# Altium PCB WPT Round 2 TX Layout.PcbDoc (part 1 of 2)
Units mm, origin at the board's own origin, x right, y up, seen from the top; angles counter-clockwise.
Board outline 82 x 80 mm, 4 copper layers (Top Layer, Ground 1, Ground 2, Bottom Layer), stack 0.603 mm thick; 124 components, 48 nets, 304 pads, 238 vias.
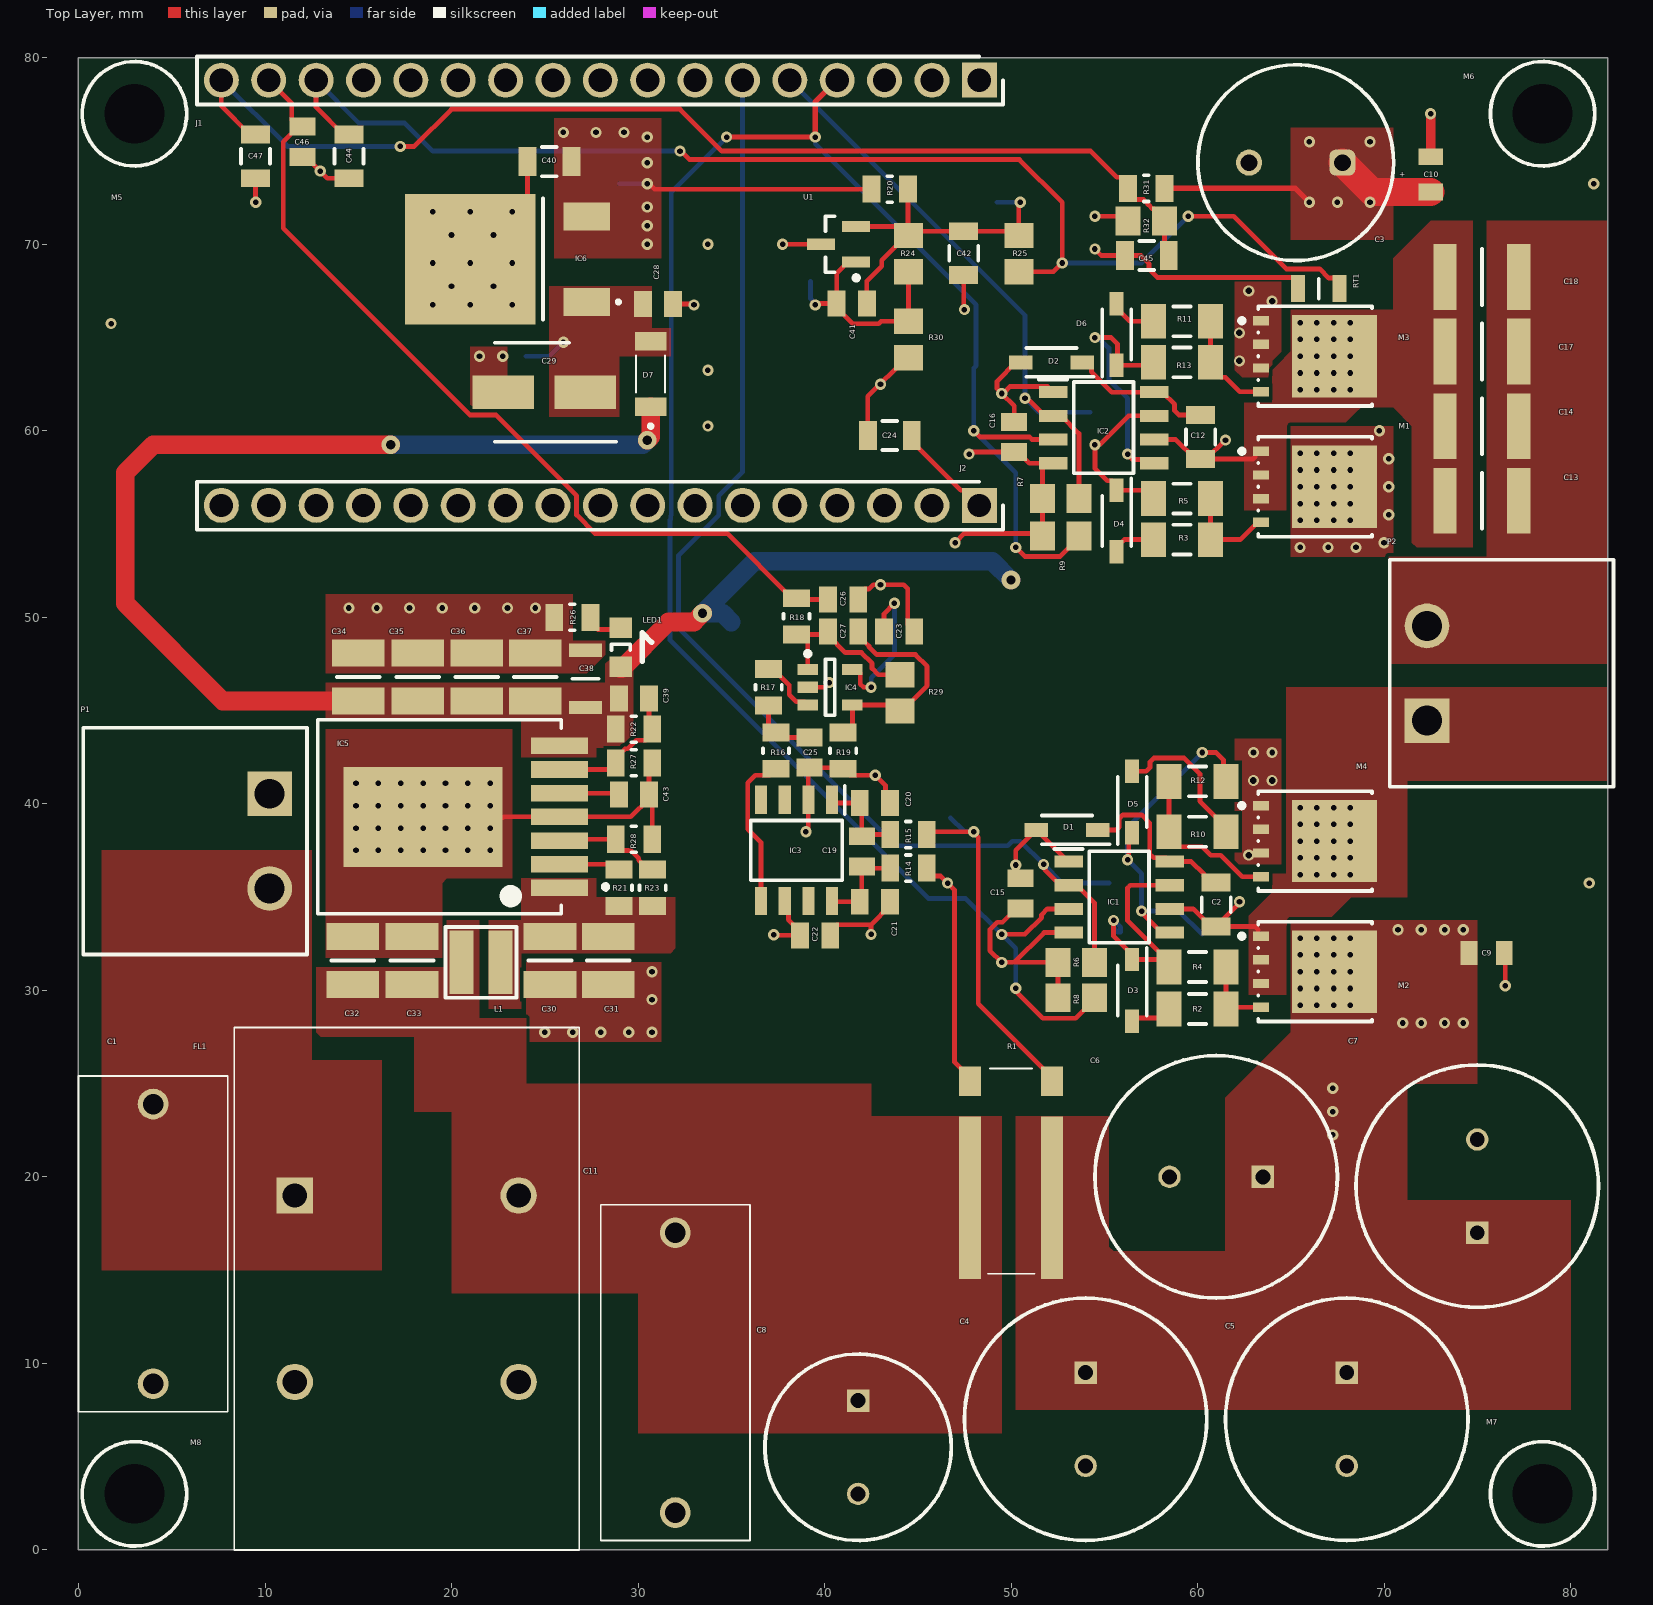
[diagram p0: Top Layer view]
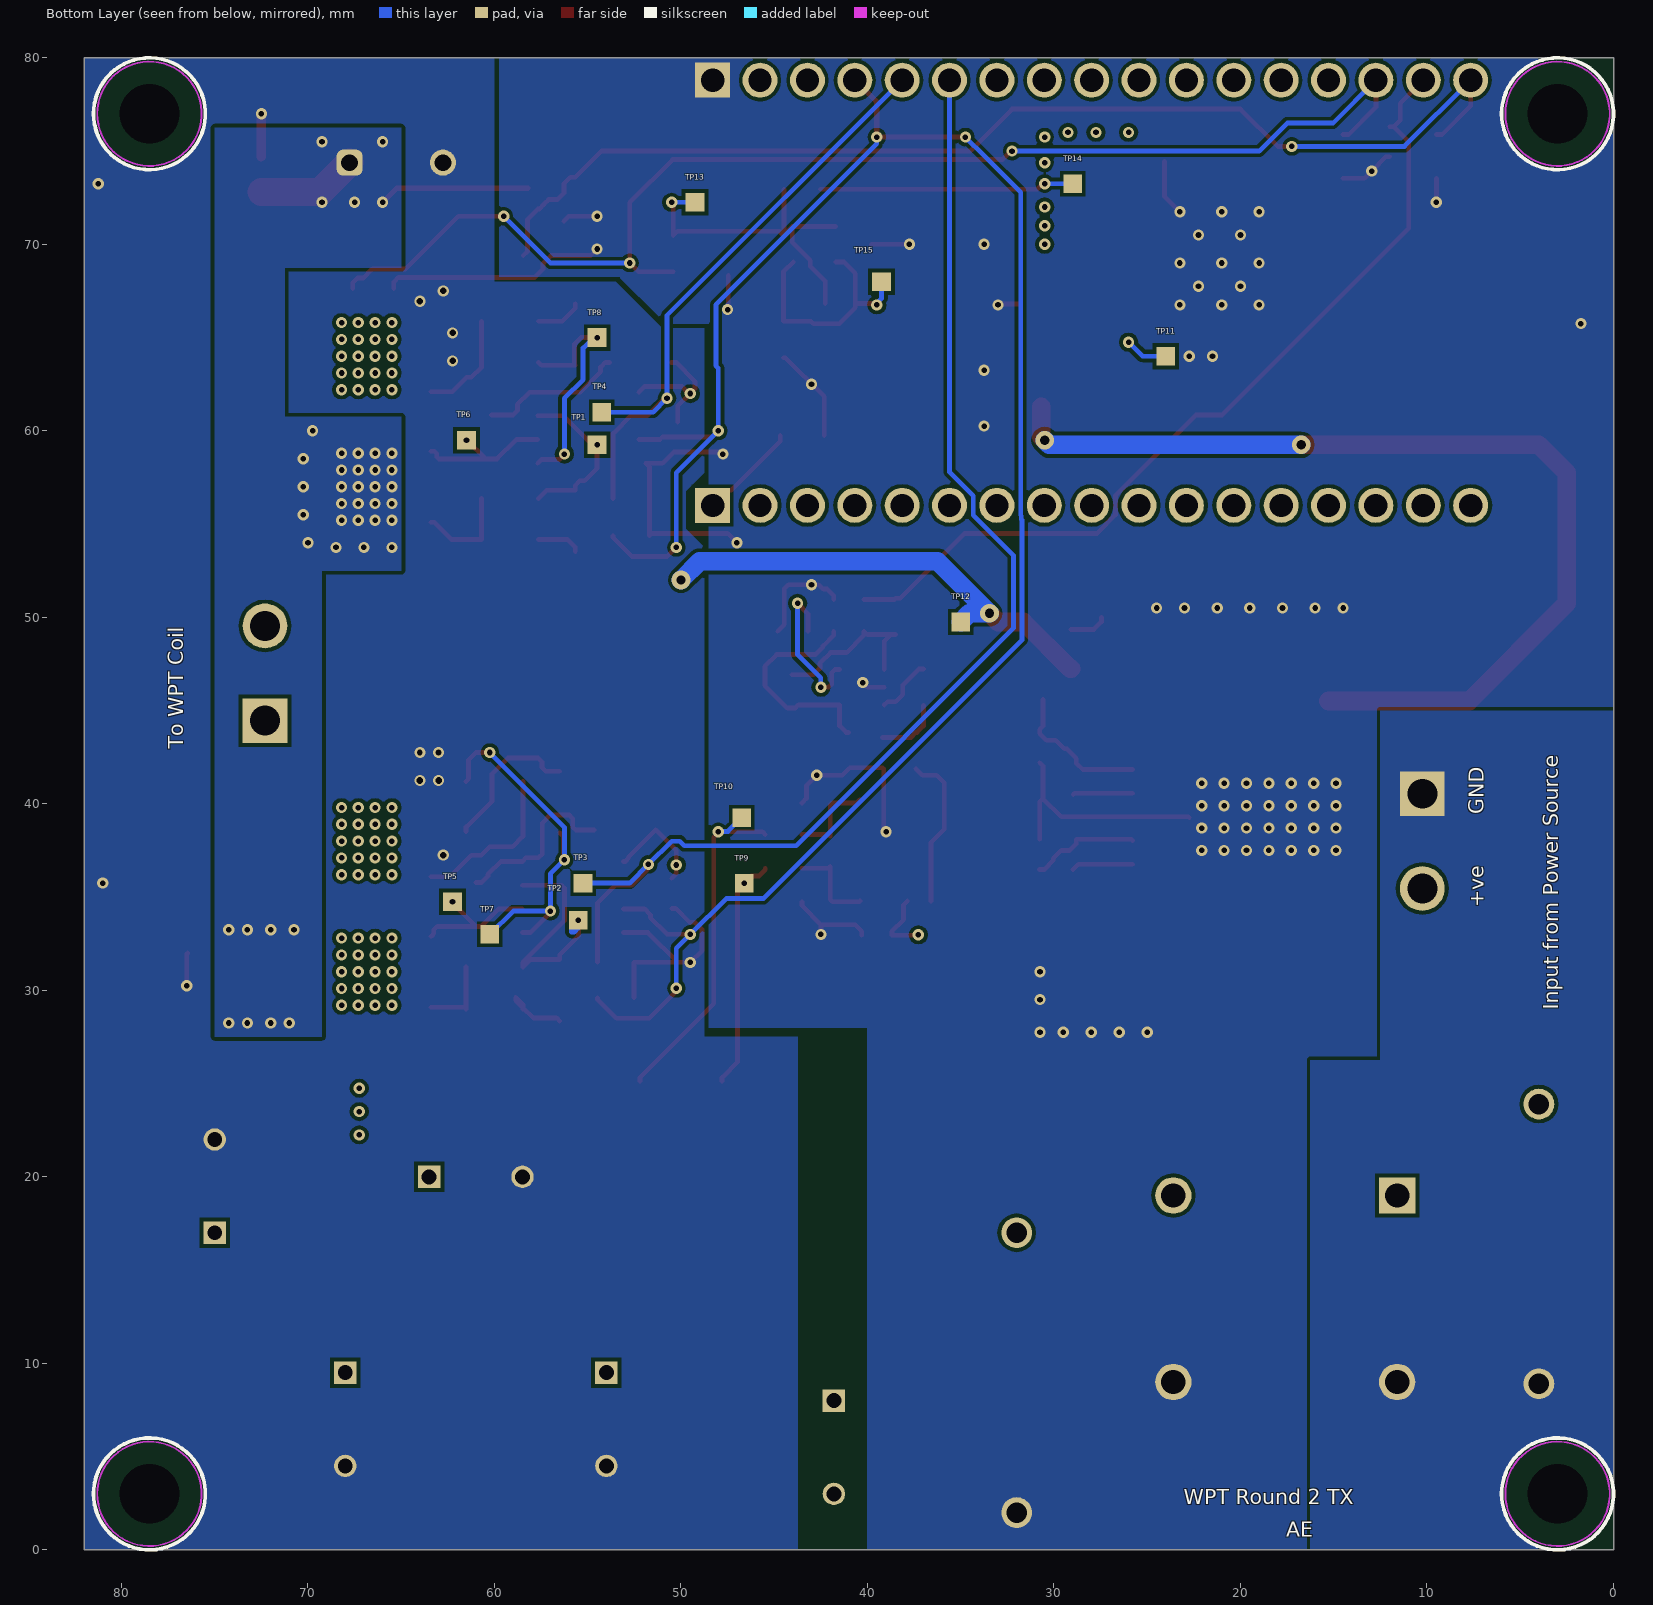
[diagram p1: Bottom Layer view, seen from below]
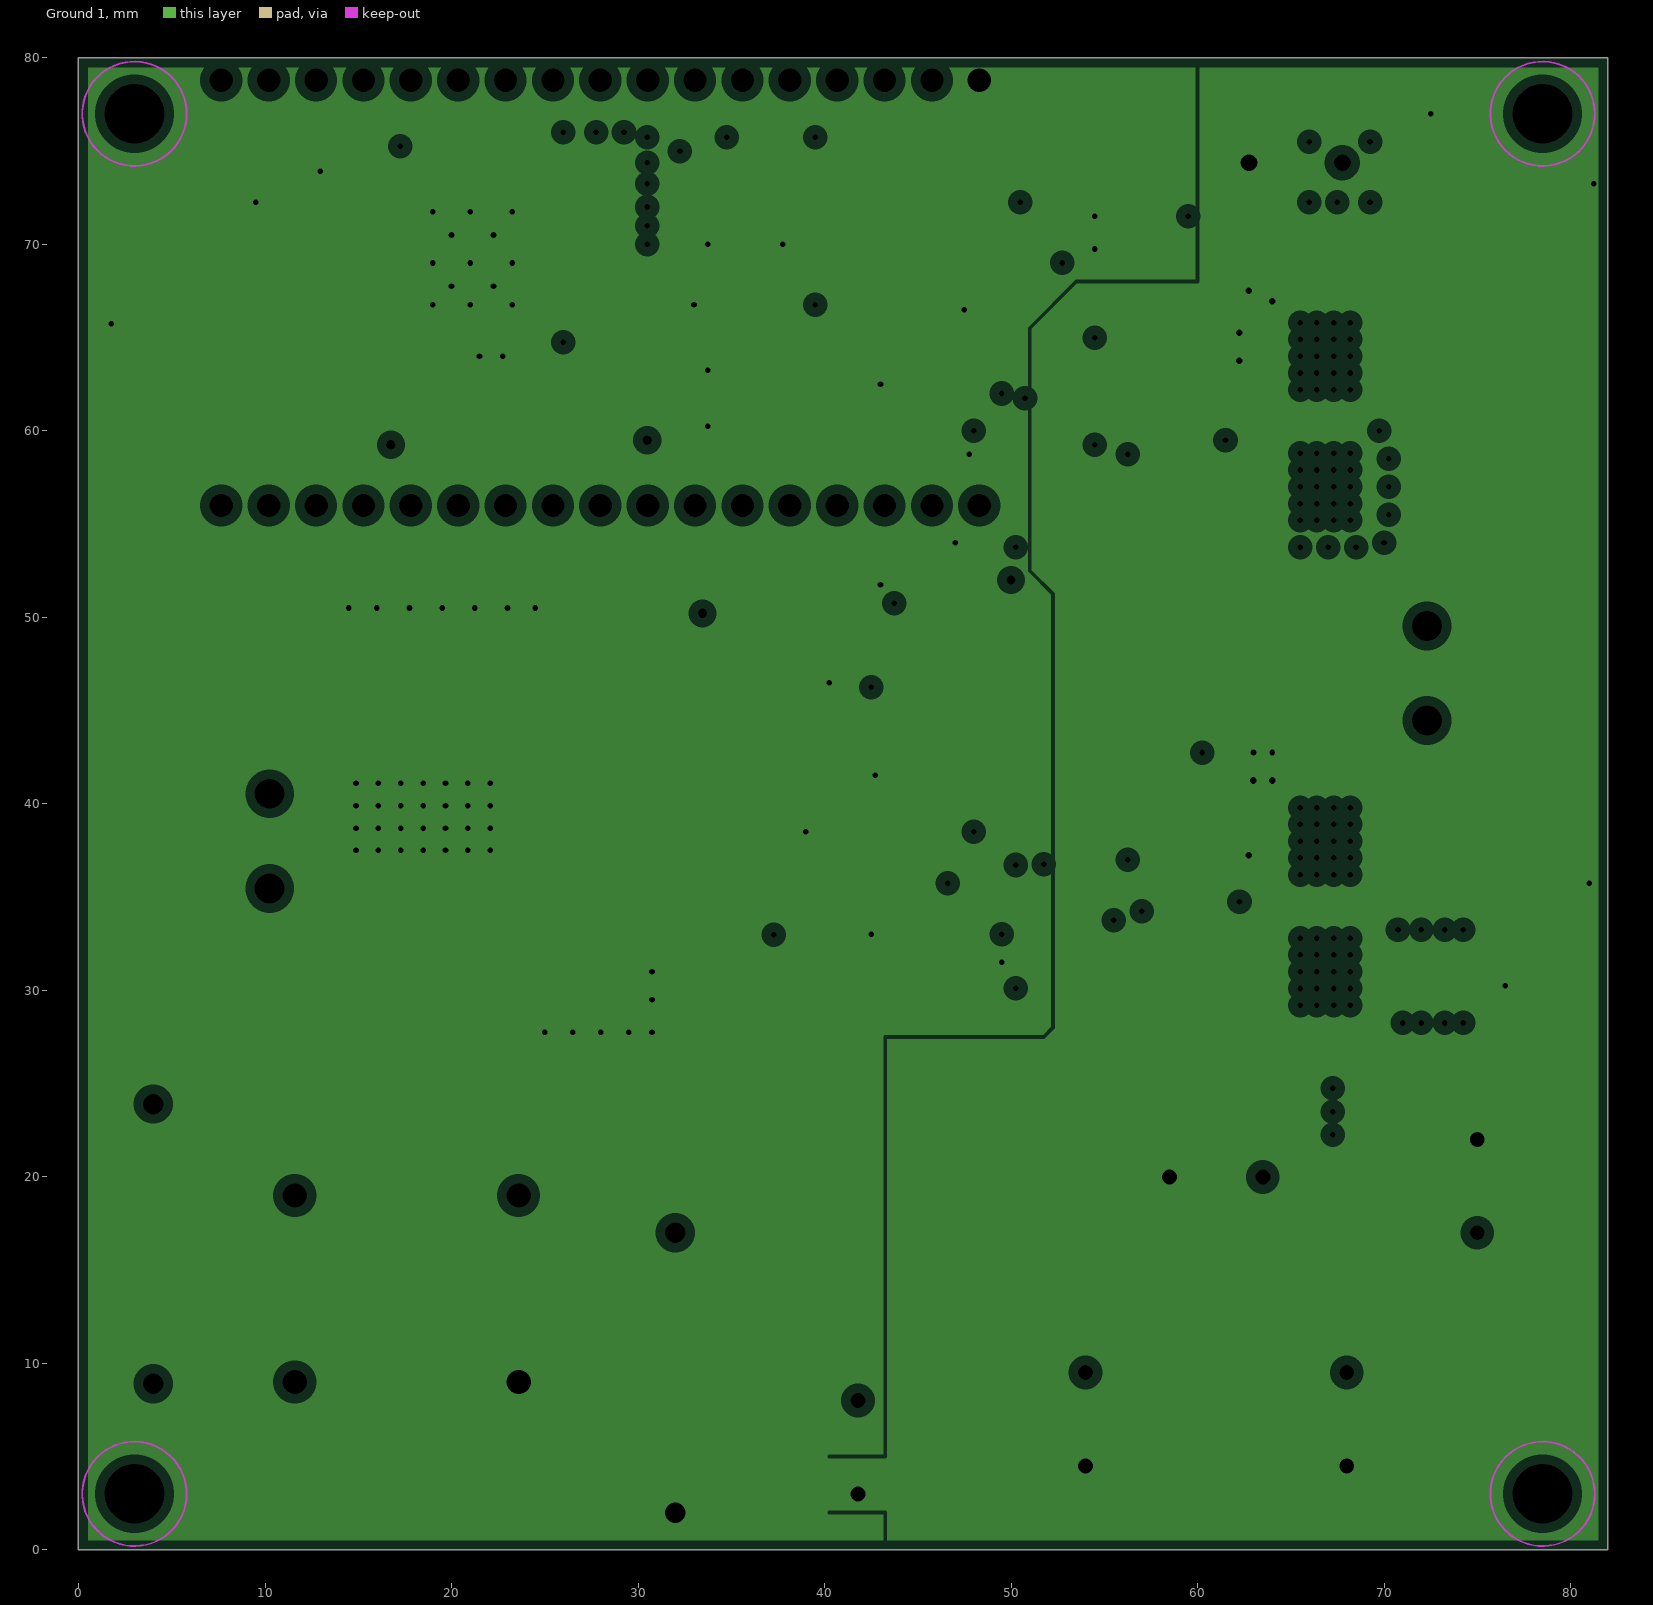
[diagram p2: Ground 1, clearances drawn from the general rule]
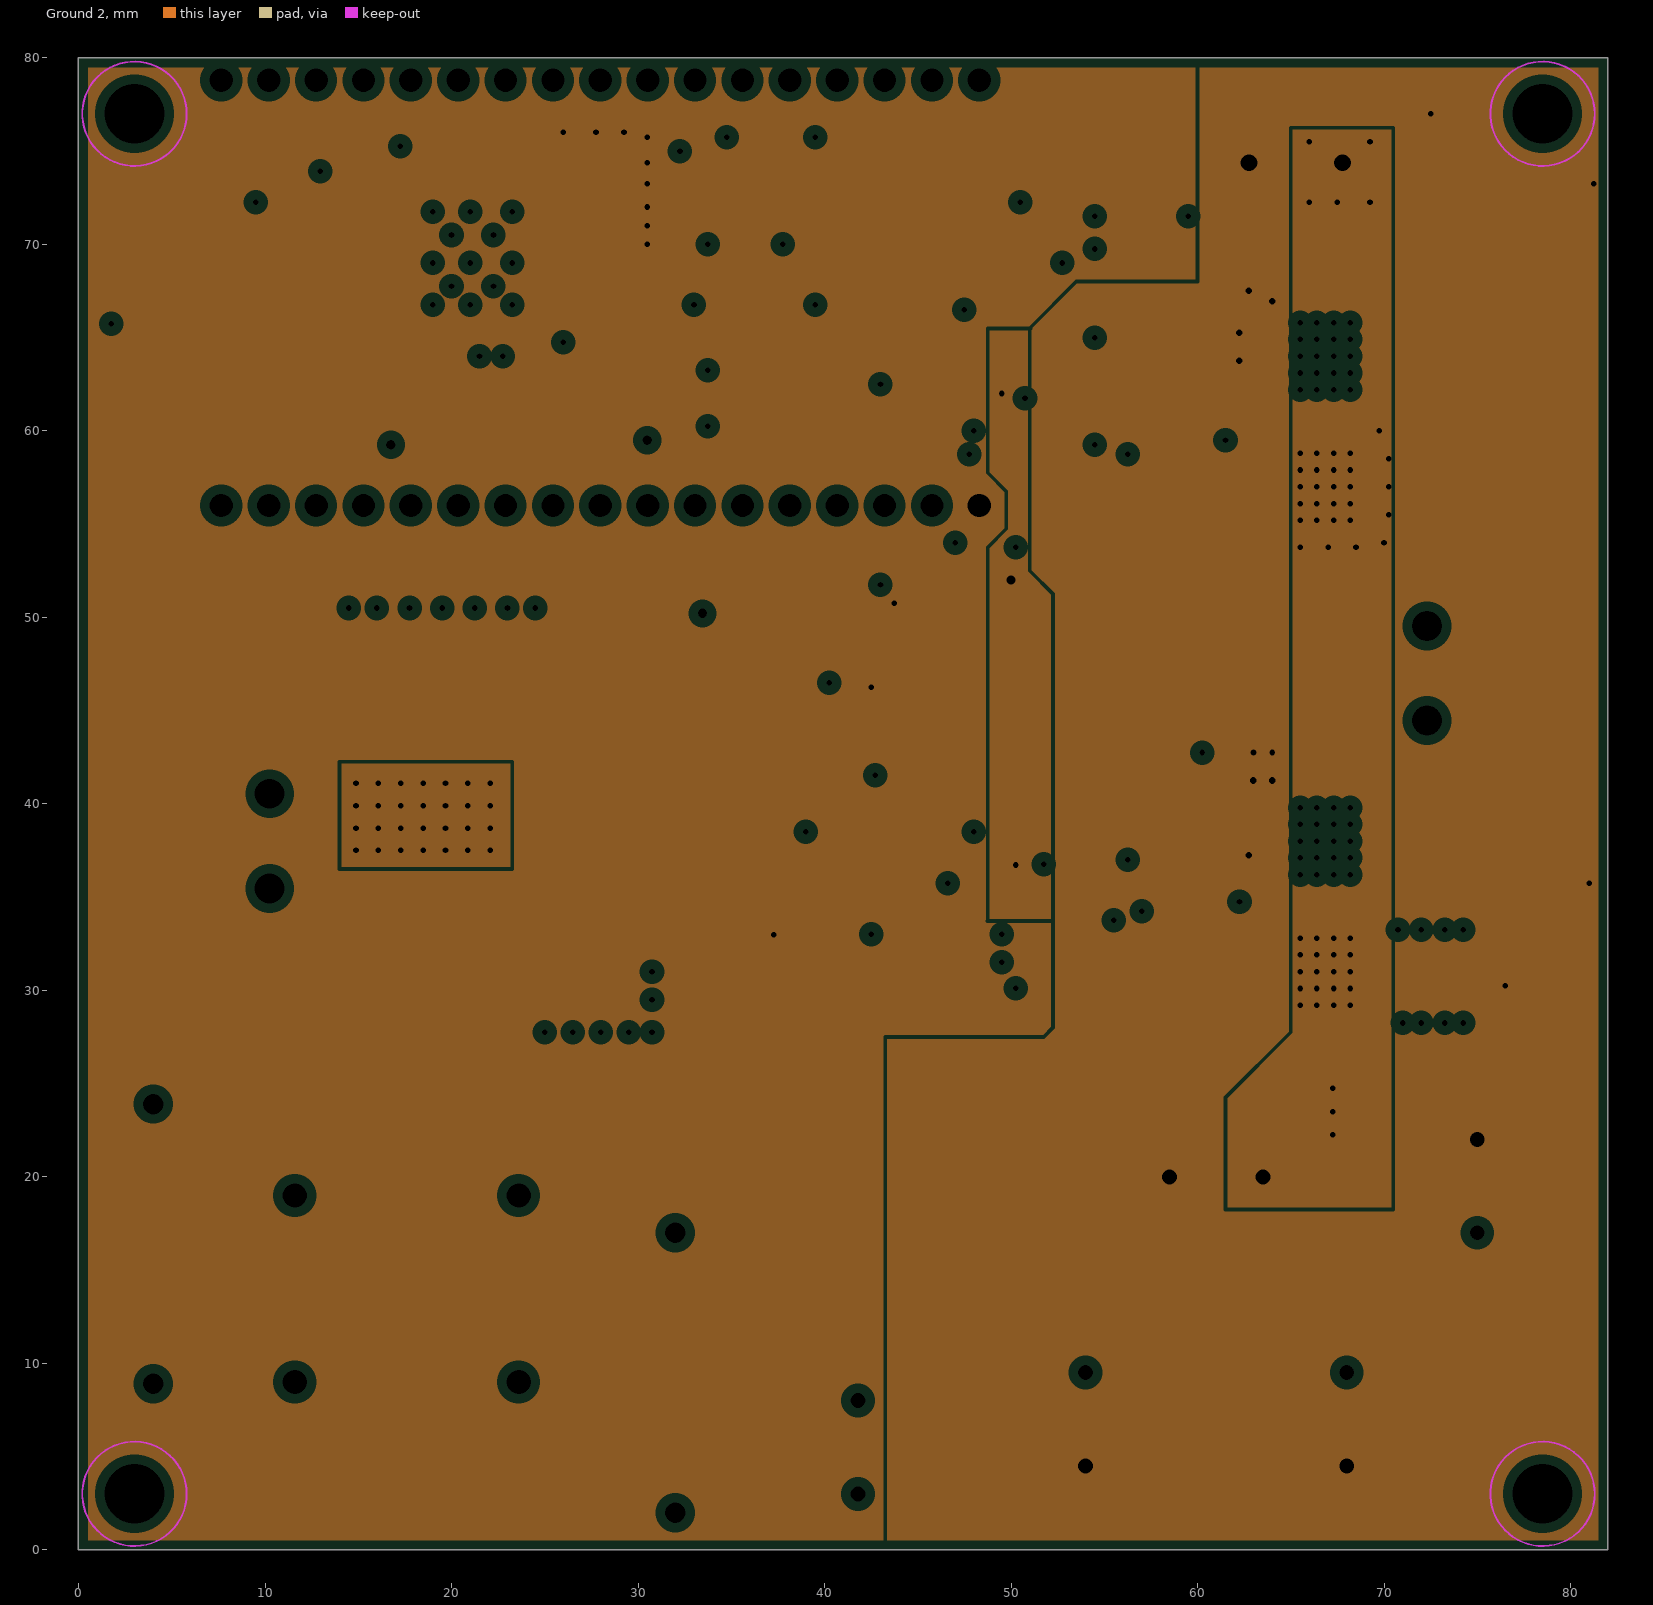
[diagram p3: Ground 2, clearances drawn from the general rule]
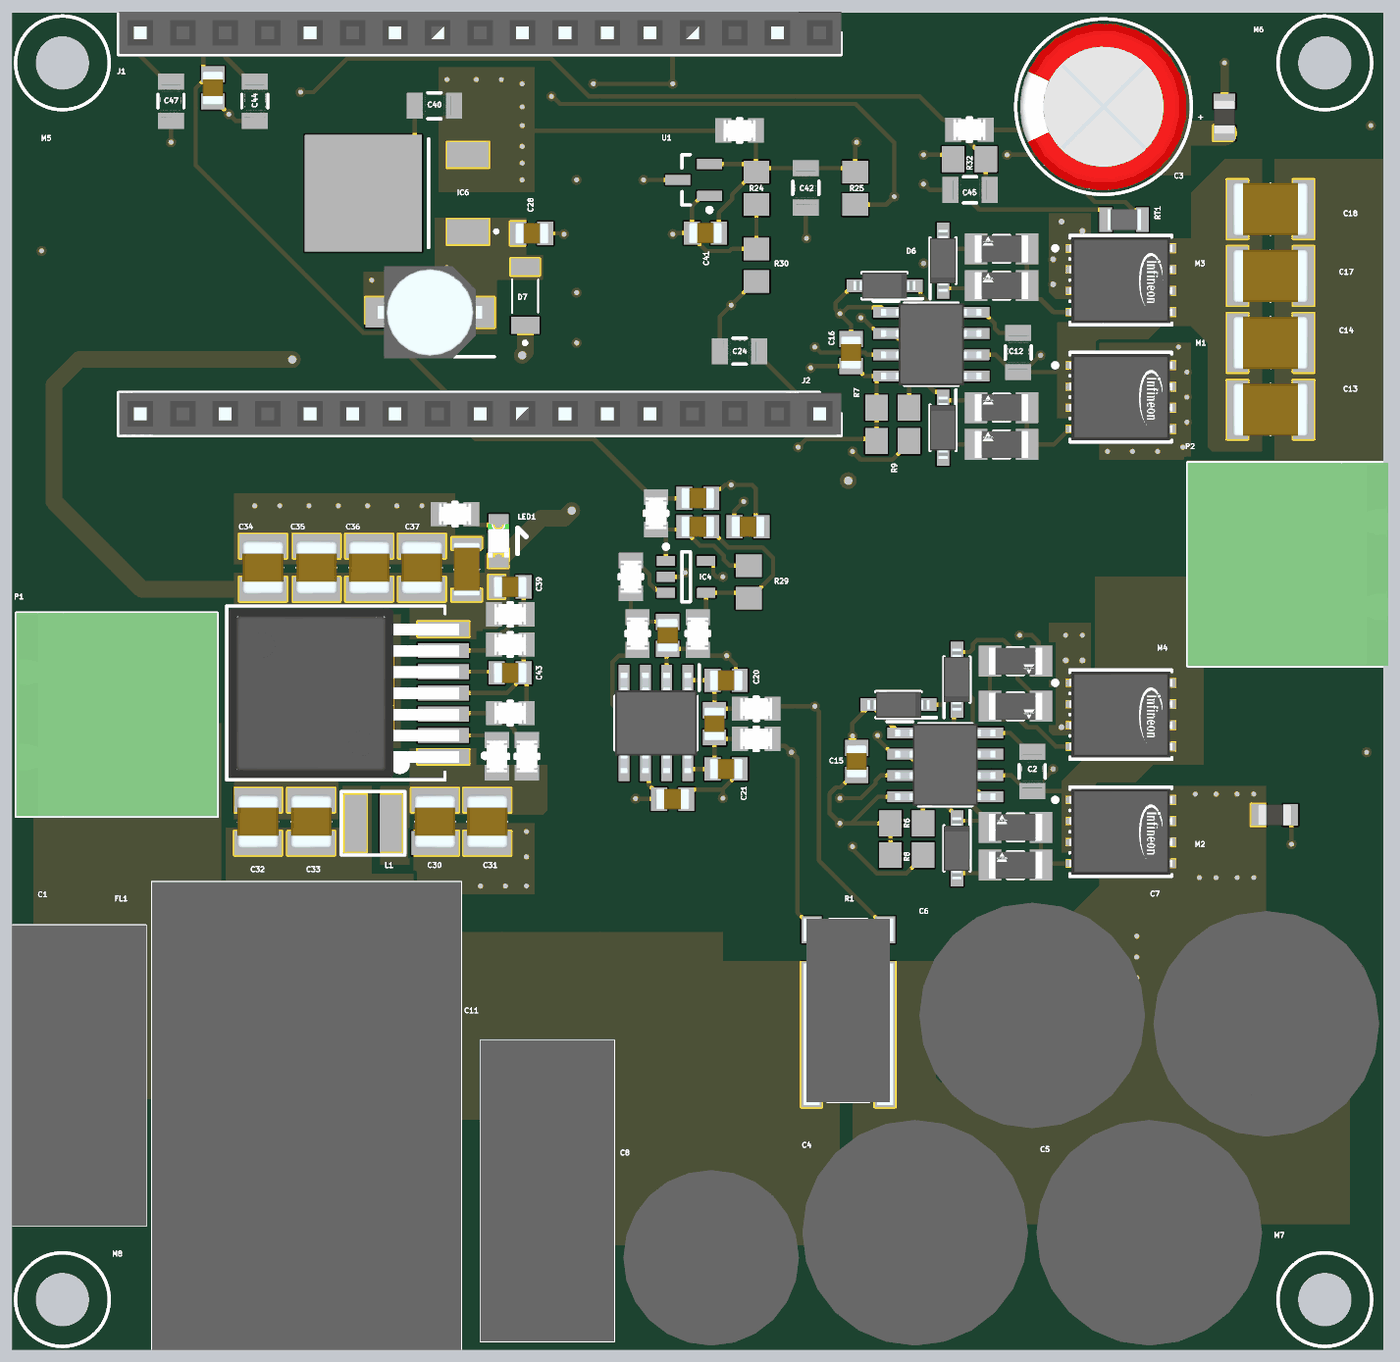
[diagram p4: 3D render of the assembled board from above, using the file's embedded part models]

## Layer stack, top to bottom
Top Solder: solder mask 0.0102, Solder Resist, Dk 3.5
Top Layer: signal copper 0.0356
Dielectric 2: prepreg 0.0711, PP-006, Dk 4.1
Ground 1: plane copper 0.035, net GND
Dielectric 1: dielectric 0.32, FR-4, Dk 4.8
Ground 2: plane copper 0.035, net (Multiple Nets)
Dielectric 3: prepreg 0.0711, PP-006, Dk 4.1
Bottom Layer: signal copper 0.0356
Bottom Solder: solder mask 0.0102, Solder Resist, Dk 3.5

## Board outline
0,80 82,80 82,0 0,0

## Design rules (kind name [scope] priority, off if disabled: settings)
Clearance [All] p1: gap=0.2 ignorepadtopadclearanceinfootprint=TRUE
Height [All] p1: minheight=-30 maxheight=50 prefheight=12.7
HoleSize [All] p1: absolutevalues=TRUE maxlimit=30 minlimit=0.025 maxpercent=80.000 minpercent=20.000
MinimumSolderMaskSliver [All] p1: minsoldermaskwidth=0.1
PlaneClearance [All] p1: clearance=0.508
PlaneConnect [All] p1: planeconnectstyle=Direct reliefexpansion=0.508 reliefentries=4 reliefconductorwidth=0.254 reliefairgap=0.254
PolygonConnect [All] p1: connectstyle=Direct reliefconductorwidth=0.254 reliefentries=4 polygonreliefangle="90 Angle" airgapwidth=0.254
RoutingVias [All] p1: holewidth=0.3 width=0.6 viastyle="Through Hole" minholewidth=0.3 minwidth=0.6 maxholewidth=0.711 maxwidth=1.27
SilkToSilkClearance [All] p1: silktosilkclearance=0
SilkToSolderMaskClearance [IsPad] p1: minsilkscreentomaskgap=0.1 clearancetoexposedcopper=TRUE
SolderMaskExpansion [All] p1: expansion=0.102 istentingtop=FALSE
Width "Power Input" [InNetClass('Power')] p1: maxlimit=10 minlimit=0.254 preferedwidth=1
Width "General Width" [All] p2: maxlimit=10 minlimit=0.254 preferedwidth=0.254
23 further rules are at their usual default settings.

## Classes and differential pairs
net class Power: 12V "DCDC Input Filtered" "DCDC Input Unfiltered" P+ P- "Vin -"

## Components (designator, comment, footprint, x,y, rotation, side; value= is the part's Value field where it differs from the comment)
C1 "470nF/275V" 890324025039CS 4,8.904 r90 top
C2 "100nF/50V" "0805 Capacitor" 61,34.6 r90 top
C3 "220uF/63V" WCAP-ATUL_D10H16 65.266,74.379 r0 top
C4 "1000uF/50V" CAPPRD500W62D1300H2650 54,9.5 r270 top
C5 "1000uF/50V" CAPPRD500W62D1300H2650 68,9.5 r270 top
C6 "1000uF/50V" CAPPRD500W62D1300H2650 63.5,20 r180 top
C7 "1000uF/50V" CAPPRD500W62D1300H2650 75,17 r90 top
C8 "220uF/63VDC" CAPPRD500W62D1000H2650 41.8,8 r270 top
C9 "100nF, 100V" WCAP-CSGP_0805_H=1.25mm 75.5,32 r180 top
C10 "100nF, 100V" WCAP-CSGP_0805_H=1.25mm 72.5,73.75 r270 top
C11 "470nF/275V" 890324025039CS 32,2 r90 top
C12 "100nF/50V" "0805 Capacitor" 60.167,59.668 r90 top
C13 "100nF/250V" CAPC4532X220N 75.25,56.25 r180 top
C14 "100nF/250V" CAPC4532X220N 75.25,60.25 r180 top
C15 "1uF/50V" CAPC2012X135N 50.5,35.2 r90 top
C16 "1uF/50V" CAPC2012X135N 50.167,59.668 r90 top
C17 "100nF/250V" CAPC4532X220N 75.25,64.25 r180 top
C18 "100nF/250V" CAPC4532X220N 75.25,68.25 r180 top
C19 "1nF/50V" CAPC2012X90N 42,37.45 r270 top
C20 "1nF/50V" CAPC2012X90N 42.7,40.05 r180 top
C21 "1nF/50V" CAPC2012X90N 42.7,34.75 r180 top
C22 "100nF/50V" CAPC2012X90N 39.5,32.95 r180 top
C23 "100nF/50V" CAPC2012X90N 44,49.25 r180 top
C24 "10nF/50V" "0805 Capacitor" 43.5,59.75 r0 top
C25 "1nF/50V" CAPC2012X90N 39.2,42.75 r90 top
C26 "1nF/50V" CAPC2012X90N 41,50.95 r180 top
C27 "33pF/50V" CAPC2012X90N 41,49.25 r180 top
C28 "100nF/50V" CAPC2012X90N 31.076,66.799 r0 top
C29 "10uF/25V" CAPAE530X550N 24.981,62.069 r180 top
C30 "4.7uF/50V" CAPC3225X280N 25.282,31.6 r90 top
C31 "4.7uF/50V" CAPC3225X280N 28.41,31.6 r90 top
C32 "4.7uF/50V" CAPC3225X280N 14.7,31.6 r270 top
C33 "4.7uF/50V" CAPC3225X280N 17.882,31.6 r270 top
C34 "47uF/16V" CAPC3225X280N 15,46.8 r270 top
C35 "47uF/16V" CAPC3225X280N 18.2,46.8 r270 top
C36 "47uF/16V" CAPC3225X280N 21.35,46.8 r270 top
C37 "47uF/16V" CAPC3225X280N 24.5,46.8 r270 top
C38 "100nF/50V" CAPC3216X90N 27.182,46.7 r270 top
C39 "22nF/50V" CAPC2012X90N 29.782,45.65 r180 top
C40 "2.2uF/25V" "0805 Capacitor" 25.25,74.434 r180 top
C41 "1nF/50V" CAPC2012X90N 41.46,66.821 r0 top
C42 "10nF/50V" "0805 Capacitor" 47.462,69.522 r90 top
C43 "220nF/50V" CAPC2012X90N 29.782,40.5 r180 top
C44 "100nF/50V" "0805 Capacitor" 14.507,74.713 r90 top
C45 "10nF/50V" "0805 Capacitor" 57.284,69.4 r0 top
C46 "1nF/50V" CAPC2012X90N 12,75.5 r90 top
C47 "10nF/50V" "0805 Capacitor" 9.493,74.713 r90 top
D1 "Diode" SOD3716X135N 53,38.6 r180 top
D2 "Diode" SOD3716X135N 52.167,63.668 r180 top
D3 "Diode" SOD3716X135N 56.5,30 r270 top
D4 "Diode" SOD3716X135N 55.667,55.168 r270 top
D5 "Diode" SOD3716X135N 56.5,40.1 r90 top
D6 "Diode" SOD3716X135N 55.667,65.168 r90 top
D7 "Zener Diode 5.6V" ZMM5232B 30.677,63.049 r90 top
FL1 "2 x 220uH 12A" 744844221 11.6,19 r270 top
IC1 "Gate Drive IC for TX" SOIC127P600X175-8N 55.8,35 r0 top
IC2 "Gate Drive IC for TX" SOIC127P600X175-8N 54.967,60.168 r0 top
IC3 "Amplifier" SOIC127P600X175-8N 38.5,37.5 r270 top
IC4 "Op-Amp" ADI-RJ-5_N 40.3,46.25 r0 top
IC5 "171032401" "7 PIN PFM" 25.782,39.3 r180 top
IC6 "5V LDO Regulator" ROHM_TO-252-3 19.4,69.2 r90 top
J1 "01x17" RHDR17W76P0X254_1X17_4318X254X826P 48.3,78.8 r180 top
J2 "01x17" RHDR17W76P0X254_1X17_4318X254X826P 48.3,56 r180 top
L1 "10uH/1.2A" WE-MAPI_3020 21.582,31.5 r180 top
LED1 "Green LED" 0805_A 29.082,48.4 r270 top
M1 "Mosfet" FP-PG-TDSON-8-MFG 66.3,57 r270 top
M2 "Mosfet" FP-PG-TDSON-8-MFG 66.3,31 r270 top
M3 "Mosfet" FP-PG-TDSON-8-MFG 66.3,64 r270 top
M4 "Mosfet" FP-PG-TDSON-8-MFG 66.3,38 r270 top
M5 "M3 Mounting Hole" "M3 HOLE" 3,77 r0 top
M6 "M3 Mounting Hole" "M3 HOLE" 78.5,77 r0 top
M7 "M3 Mounting Hole" "M3 HOLE" 78.5,3 r0 top
M8 "M3 Mounting Hole" "M3 HOLE" 3,3 r0 top
P1 "691313510002" 691313510002 6.25,38 r270 top
P2 "691313510002" 691313510002 76.304,47 r90 top
R1 "0R005 5W" FC4L110R005FER 50,22 r0 top
R2 "4.7Ohm" FP-CRCW1206-e3-IPC_A 60,29 r180 top
R3 "4.7Ohm" FP-CRCW1206-e3-IPC_A 59.167,54.168 r180 top
R4 "10R" FP-CRCW1206-e3-IPC_A 60,31.25 r180 top
R5 "10R" FP-CRCW1206-e3-IPC_A 59.167,56.368 r180 top
R6 "10K" "0805 Resistor" 53.5,31.5 r0 top
R7 "10K" "0805 Resistor" 52.667,56.368 r0 top
R8 "10K" "0805 Resistor" 53.5,29.6 r0 top
R9 "10K" "0805 Resistor" 52.667,54.368 r0 top
R10 "4.7Ohm" FP-CRCW1206-e3-IPC_A 60,38.5 r0 top
R11 "4.7Ohm" FP-CRCW1206-e3-IPC_A 59.167,65.868 r180 top
R12 "10R" FP-CRCW1206-e3-IPC_A 60,41.2 r0 top
R13 "10R" FP-CRCW1206-e3-IPC_A 59.167,63.668 r180 top
R14 "470R" FP-CRCW0805-e3-MFG 44.5,36.55 r0 top
R15 "470R" FP-CRCW0805-e3-MFG 44.5,38.35 r0 top
R16 "1KR" FP-CRCW0805-e3-MFG 37.4,42.85 r270 top
R17 "6K8R" FP-CRCW0805-e3-MFG 37,46.25 r270 top
R18 "100R" FP-CRCW0805-e3-MFG 38.5,50.05 r270 top
R19 "10KR" FP-CRCW0805-e3-MFG 41,42.85 r270 top
R20 "1KR" FP-CRCW0805-e3-MFG 43.5,72.954 r180 top
R21 "100KO" FP-CRCW0805-e3-MFG 28.982,35.5 r270 top
R22 "18KO" FP-CRCW0805-e3-MFG 29.782,44 r180 top
R23 "160KO" FP-CRCW0805-e3-MFG 30.782,35.5 r270 top
R24 "15K" "0805 Resistor" 44.504,69.5 r90 top
R25 "10k" "0805 Resistor" 50.419,69.5 r90 top
R26 "2KO" FP-CRCW0805-e3-MFG 26.482,50 r180 top
R27 "1K3O" FP-CRCW0805-e3-MFG 29.782,42.2 r180 top
R28 "10KO" FP-CRCW0805-e3-MFG 29.782,38.1 r180 top
R29 "15K" "0805 Resistor" 44.044,45.946 r90 top
R30 "10K" "0805 Resistor" 44.504,64.896 r90 top
R31 "1M ohm" FP-CRCW0805-e3-MFG 57.25,73 r0 top
R32 "56K" "0805 Resistor" 57.25,71.239 r0 top
RT1 "Thermistor 10K" THRMC2012X95N 66.5,67.624 r180 top
TP1 "TP" "Test Point" 54.5,59.25 r180 bottom
TP2 "TP" "Test Point" 55.5,33.75 r180 bottom
TP3 "TP" "Test Point" 55.25,35.75 r180 bottom
TP4 "TP" "Test Point" 54.25,61 r180 bottom
TP5 "TP" "Test Point" 62.25,34.75 r180 bottom
TP6 "TP" "Test Point" 61.5,59.5 r180 bottom
TP7 "TP" "Test Point" 60.25,33 r180 bottom
TP8 "TP" "Test Point" 54.5,65 r180 bottom
TP9 "TP" "Test Point" 46.601,35.75 r180 bottom
TP10 "TP" "Test Point" 46.75,39.25 r90 bottom
TP11 "TP" "Test Point" 24,64 r180 bottom
TP12 "TP" "Test Point" 35,49.75 r90 bottom
TP13 "TP" "Test Point" 49.25,72.25 r90 bottom
TP14 "TP" "Test Point" 29,73.25 r90 bottom
TP15 "TP" "Test Point" 39.25,68 r90 bottom
U1 "Shunt Voltage Reference Diode" SOT23-3_N 40.75,70 r180 top

## Footprints (in the part's own frame and the unit in brackets; to place one, negate y for a bottom-side part, rotate by r counter-clockwise, add the part's x,y. Pads: shape width x height; smd on the part's side, far side on the other; paste and mask are expansions set on the pad)
"7 PIN PFM" [mm] "SMD, 7-Leads, Body 10.4x10.1mm (max), Pitch 1.27mm, IPC Medium Density"
  rect 3.06x0.89 smd: 1(0,3.81) 2(0,2.54) 3(0,1.27) 4(0,0) 5(0,-1.27) 6(0,-2.54) 7(0,-3.81)
  rect 8.54x5.35 smd: 8(7.305,0)
  silkscreen extent -2.6,-5.2 12.95,5.2, body extent -0.93,-5.06 12.84,5.1, height 4.72
"0805 Capacitor" [mm]
  rect 0.956x1.556 smd paste+0 mask+0: 1(-1.175,0) 2(1.175,0)
  silkscreen extent -0.4,-0.78 0.4,0.78, body extent -2.15,-1.28 2.15,1.28, height 0.25
"0805 Resistor" [mm] "Chip Resistor, 2-Leads, Body 2.00x1.25mm, IPC Low Density"
  rect 1.35x1.55 smd: 1(-0.975,0) 2(0.975,0)
  body extent -1.1,-0.72 1.1,0.72, height 0.7
0805_A [mm] "Chip LED, 2-Leads, Body 2.0x1.3mm, IPC Medium Density"
  rect 1.1x1.2 smd: 1(-1.05,0) 2(1.05,0)
  silkscreen extent -0.76,-0.5 0.76,1.65, body extent -1,-0.62 1,0.63, height 0.68
744844221 [mm]
  rect 1.95x1.95 hole 1.3: 2(0,0)
  round 1.95 hole 1.3: 4(10,0) 7(10,12) 9(0,12)
  silkscreen extent -9,-3.25 19,15.25, body extent -9,-3.25 19,15.25, height 33.1
691313510002 [mm] "5,08mm - PCB Headers - Horizontal - Closed ends - 02p"
  rect 2.4x2.4 hole 1.6: 1(-2.54,4)
  round 2.4 hole 1.6: 2(2.54,4)
  silkscreen extent -6.08,-6 6.08,6, body extent -6.08,-6 6.08,6, height 8.55
890324025039CS [mm]
  round 1.65 hole 1.1: 1(0,0) 2(15,0)
  silkscreen extent -1.5,-4 16.5,4, body extent -1.5,-4 16.5,4, height 14.6
ADI-RJ-5_N [mm] "SOT-23, 5-Leads, Body 2.9x1.6mm, Pitch 0.95mm, IPC Medium Density"
  rect 1.1x0.6 smd: 1(-1.2,0.95) 2(-1.2,0) 3(-1.2,-0.95) 4(1.2,-0.95) 5(1.2,0.95)
  silkscreen extent -1.32,-1.5 0.25,1.92, body extent -0.85,-1.5 0.85,1.5, height 1.45
CAPAE530X550N [mm]
  rect 3.3x1.8 smd: 1(-2.2,0) 2(2.2,0)
  silkscreen extent -3.85,-2.65 2.65,2.65, body extent -3.13,-2.75 3.13,2.75, height 5.5
CAPC2012X90N [mm]
  rect 0.96x1.39 smd: 1(-0.81,0) 2(0.81,0)
  body extent -1,-0.63 1,0.63, height 0.9
CAPC2012X135N [mm]
  rect 0.96x1.39 smd: 1(-0.81,0) 2(0.81,0)
  body extent -1,-0.63 1,0.63, height 1.35
CAPC3216X90N [mm]
  rect 0.71x1.78 smd: 1(-1.54,0) 2(1.54,0)
  silkscreen extent 0,-0.7 0,0.7, body extent -1.6,-0.8 1.6,0.8, height 0.9
CAPC3225X280N [mm]
  rect 1.43x2.82 smd: 1(-1.29,0) 2(1.29,0)
  silkscreen extent 0,-1.15 0,1.15, body extent -1.6,-1.25 1.6,1.25, height 2.8
CAPC4532X220N [mm]
  rect 1.25x3.52 smd: 1(-1.98,0) 2(1.98,0)
  silkscreen extent 0,-1.5 0,1.5, body extent -2.25,-1.6 2.25,1.6, height 2.2
CAPPRD500W62D1000H2650 [mm]
  rect 1.2x1.2 hole 0.8: 1(0,0)
  round 1.2 hole 0.8: 2(5,0)
  silkscreen extent -2.5,-5 7.5,5, body extent -2.75,-5.25 7.75,5.25, height 26.5
CAPPRD500W62D1300H2650 [mm]
  rect 1.2x1.2 hole 0.8: 1(0,0)
  round 1.2 hole 0.8: 2(5,0)
  silkscreen extent -4,-6.5 9,6.5, body extent -4.25,-6.75 9.25,6.75, height 26.5
FC4L110R005FER [mm]
  rect 1.2x8.7 smd: 1(-2.2,-3.125) 2(2.2,-3.125)
  rect 1.2x1.6 smd: 3(2.2,3.125) 4(-2.2,3.125)
  silkscreen extent -1.25,-7.2 1.25,3.8, body extent -2.68,-7.35 2.68,3.8, height 0.8
FP-CRCW0805-e3-MFG [mm]
  rect 0.95x1.45 smd paste+0 mask+0: 1(-0.975,0) 2(0.975,0)
  silkscreen extent -0.13,-0.7 0.13,0.7, body extent -1.55,-0.82 1.55,0.82, height 0.25
FP-CRCW1206-e3-IPC_A [mm]
  rect 1.356x1.858 smd paste+0 mask+0: 1(-1.526,0) 2(1.526,0)
  silkscreen extent -0.47,-0.8 0.47,0.8, body extent -2.7,-1.43 2.7,1.43, height 0.25
FP-PG-TDSON-8-MFG [mm]
  rect 0.5x0.85 smd paste-1000 mask+0: 1(-1.905,-2.9) 2(-0.635,-2.9) 3(0.635,-2.9) 4(1.905,-2.9)
  rect 4.41x4.55 smd paste-1000 mask-1000: 5-6-7-8(0,1.05)
  silkscreen extent -2.68,-4.05 2.68,3.05, body extent -2.99,-3.43 3,3.42, height 0.25
"M3 HOLE" [mm]
  round 0 hole 3.2 unplated mask+0.1: 1(0,0)
  Keep-Out Layer circle w0.1: c0,0 r2.8
  silkscreen extent -2.8,-2.8 2.8,2.8
RHDR17W76P0X254_1X17_4318X254X826P [mm]
  rect 1.875x1.875 hole 1.25: 1(0,0)
  round 1.875 hole 1.25: 2(2.54,0) 3(5.08,0) 4(7.62,0) 5(10.16,0) 6(12.7,0) 7(15.24,0) 8(17.78,0) 9(20.32,0) 10(22.86,0) 11(25.4,0) 12(27.94,0) 13(30.48,0) 14(33.02,0) 15(35.56,0) 16(38.1,0) 17(40.64,0)
  silkscreen extent -1.27,-1.27 41.95,1.31, body extent -1.27,-1.27 41.91,1.27, height 8.26
ROHM_TO-252-3 [mm]
  rect 1.5x2.5 smd: 1(-2.3,-7.85) 2(2.3,-7.85)
  rect 7x7 smd: 3(0,-1.6)
  silkscreen extent -3.25,-9.63 3.25,-5.5
SOD3716X135N [mm]
  rect 1.25x0.75 smd: 1(-1.65,0) 2(1.65,0)
  silkscreen extent -2.27,-0.77 1.35,0.77, body extent -1.85,-0.77 1.85,0.77, height 1.35
SOIC127P600X175-8N [mm]
  rect 1.525x0.65 smd: 1(-2.712,1.905) 2(-2.712,0.635) 3(-2.712,-0.635) 4(-2.712,-1.905) 5(2.712,-1.905) 6(2.712,-0.635) 7(2.712,0.635) 8(2.712,1.905)
  silkscreen extent -3.47,-2.45 1.6,2.58, body extent -3,-2.45 3,2.45, height 1.75
SOT23-3_N [mm] "SOT23, 3-Leads, Body 2.9x1.3mm, Pitch 0.95mm, Lead Span 2.4mm, IPC Medium Density"
  rect 1.5x0.6 smd: 1(-0.95,0.95) 2(-0.95,-0.95) 3(0.95,0)
  silkscreen extent -1.07,-1.5 0.7,1.92, body extent -0.7,-1.52 0.7,1.52, height 1.12
"Test Point" [mm]
  rect 1x1 smd: 1(0,0)
THRMC2012X95N [mm]
  rect 0.75x1.45 smd: 1(-1.1,0) 2(1.1,0)
  silkscreen extent 0,-0.53 0,0.53, body extent -1,-0.63 1,0.63, height 0.95
WCAP-ATUL_D10H16 [mm] "Aluminum Electrolytic Capacitors, 10x16mm"
  rrect50% 1.4x1.4 hole 0.9: 1(2.5,0)
  round 1.4 hole 0.9: 2(-2.5,0)
  silkscreen extent -5.25,-5.25 5.25,5.25, body extent -4.99,-5 5,5, height 16.31
WCAP-CSGP_0805_H=1.25mm [mm] "Ceramic Capacitors, body 2x1.25mm"
  rect 0.9x1.3 smd: 1(-0.95,0) 2(0.95,0)
  body extent -1,-0.62 1,0.63, height 1.25
WE-MAPI_3020 [mm]
  rect 1.3x3.4 smd: 1(-1.05,0) 2(1.05,0)
  silkscreen extent -1.9,-1.9 1.9,1.9
ZMM5232B [mm]
  rect 1x1.7 smd: 1(-1.75,0) 2(1.75,0)
  silkscreen extent -2.9,-0.78 1,0.78

## Part data
C1 C11: library part 890324025039CS, "Safety Capacitor, 470nF/275V", Manufacturer_Name="Wurth Elektronik", Height=14.5mm, Manufacturer_Part_Number=890324025039CS
C2 C12 C44: library part 885012207098, Supplier Part Number 1=710-885012207098, Supplier 1=Mouser
C3: library part 860020775019, "WCAP-ATUL Aluminum Electrolytic Capacitor, Radial, THT, D10xH16mm, 220uF/63V", Capacitance=220uF, Capacitance Tolerance=+/-20%, Leakage Current=820uA, Manufacturer="Wurth Elektronik", Manufacturer Part Number=860040881014, Operating Temperature="-40 to +105degC", Rated Voltage=63VDC, Ripple Current=375mA, Supplier Part Number 1=710-860020775019, ComponentLink1Description=Manufacturer, ComponentLink1URL=http://www.we-online.de, ComponentLink2Description=Datasheet, ComponentLink2URL=https://www.we-online.com/catalog/datasheet/860040881014.pdf, Diameter=18mm, Dissipation Factor=9%, Endurance=10000h, Height=41mm, Mounting Technology=THT, Packaging="Ammo Pack", Published Date="October 2020", Supplier 1=Mouser, Technical Reference=ATDL410821M100DSPS1K000
C4 C5 C6 C7: library part ESH108M050AL4AA, "Capacitor 1000uF", Supplier Part Number 1=80-ESH108M050AL4AA, Supplier 1=Mouser
C8: library part 860040775010, "Polarised Cap, 220uF/63VDC", Manufacturer_Name="Wurth Elektronik", Datasheet Link=https://www.mouser.de/datasheet/2/445/860040775010-1725627.pdf, Height=26.5mm, Manufacturer_Part_Number=860040775010
C9 C10: library part 885012207128, "WCAP-CSGP Multilayer Ceramic Chip Capacitor, General Purpose, size 0805, X7R, 100nF, 100V", Capacitance=100nF, Capacitance Tolerance=+/-10%, Isolation Resistance=>=1GOhm, Manufacturer="Wurth Elektronik", Operating Temperature="-55 to +125degC", Rated Voltage=100VDC, Ceramic Type=X7R, ComponentLink1Description=Manufacturer, ComponentLink1URL=http://www.we-online.de, ComponentLink2Description=Datasheet, ComponentLink2URL=https://www.we-online.com/catalog/datasheet/885012207128.pdf, Dissipation Factor=#NAME?, Height=1.25mm, Manufacturer Part Number=885012207128, Mounting Technology=SMT, Packaging="Tape and Reel", Published Date="May 2020", Size=0805, Technical Reference=X7R0805104K100DFCT10000
C13 C14 C17 C18: library part C1812C104JAGACAUTO, Manufacturer_Name=Kemet, Supplier Part Number 1=80-C1812C104JAGAUTO, Datasheet Link=https://api.kemet.com/component-edge/download/datasheet/C1812C104JAGACAUTO.pdf, Height=2.2mm, Manufacturer_Part_Number=C1812C104JAGACAUTO, Supplier 1=Mouser
C15 C16: library part 885012207103, "Capacitor 1uF/50V", Manufacturer_Name="Wurth Elektronik", Supplier Part Number 1=710-885012207103, Datasheet Link=https://katalog.we-online.com/pbs/datasheet/885012207103.pdf, Height=1.35mm, Manufacturer_Part_Number=885012207103, Supplier 1=Mouser
C19 C20 C21 C25 C26 C41 C46: library part 885012207086, Manufacturer_Name="Wurth Elektronik", Supplier Part Number 1=710-885012207086, Datasheet Link=https://katalog.we-online.com/pbs/datasheet/885012207086.pdf, Height=0.9mm, Manufacturer_Part_Number=885012207086, Supplier 1=Mouser
C22 C23 C28: library part 885012207098, Manufacturer_Name="Wurth Elektronik", Supplier Part Number 1=710-885012207098, Height=0.9mm, Supplier 1=Mouser
C24 C42 C45 C47: library part 885012207092, Supplier Part Number 1=710-885012207092, Supplier 1=Mouser
C27: library part C0805C330J5GACTU, "Capacitor 33pF/50V", Manufacturer_Name=Kemet, Supplier Part Number 1=80-C0805C330J5G, Manufacturer_Part_Number=C0805C330J5GACTU, Supplier 1=Mouser
C29: library part 865060440001, "Capacitor Polarised 10uF/25V", Manufacturer_Name="Wurth Elektronik", Datasheet Link=http://katalog.we-online.com/pbs/datasheet/865060440001.pdf, Height=5.5mm, Manufacturer_Part_Number=865060440001
C30 C31 C32 C33: library part 885012209048, "Capacitor 4.7uF/50V", Manufacturer_Name="Wurth Elektronik", Supplier Part Number 1=710-885012209048, Datasheet Link=https://katalog.we-online.com/pbs/datasheet/885012209048.pdf, Height=2.8mm, Manufacturer_Part_Number=885012209048, Supplier 1=Mouser
C34 C35 C36 C37: library part EMK325ABJ476MMHP, "Capacitor 47uF/16V", Supplier Part Number 1=963-EMK325ABJ476MMHP, Supplier 1=Mouser
C38: library part 885012208087, "Capacitor 100nF/50V", Manufacturer_Name="Wurth Elektronik", Mouser2 Part Number=710-885012208087, Datasheet Link=https://componentsearchengine.com//885012208087.pdf, Height=0.9mm, Manufacturer_Part_Number=885012208087, Mouser2 Price/Stock=https://www.mouser.com/Search/Refine.aspx?Keyword=710-885012208087, Supplier 1=Mouser, Supplier Part Number 1=710-885012208087
C39: library part 885012207094, "Capacitor 22nF/50V", Manufacturer_Name="Wurth Elektronik", Mouser2 Part Number=710-885012207094, Datasheet Link=https://componentsearchengine.com//885012207094.pdf, Height=0.9mm, Manufacturer_Part_Number=885012207094, Mouser2 Price/Stock=https://www.mouser.com/Search/Refine.aspx?Keyword=710-885012207094, Supplier 1=Mouser, Supplier Part Number 1=710-885012207094
C40: library part 885012207079, Capacitance=2.2, Case Code (Imperial)=0805, Case Code (Metric)=2012, Dielectric=X5R, Max Operating Temperature=125°C, Package Quantity=2000, Supplier Part Number 1=710-885012207079, Voltage Rating (DC)=25V, Case/Package=0805, Supplier 1=Mouser
C43: library part 885012207100, "Capacitor 220nF / 50V", Supplier Part Number 1=710-885012207100, Supplier 1=Mouser
D1 D2 D3 D4 D5 D6: library part 1N4148W-E3-08, Manufacturer_Name=Vishay, Mouser2 Part Number=78-1N4148W-E3-08, Supplier Part Number 1=1N4148W-E3-08CT-ND, Datasheet Link=https://componentsearchengine.com//1N4148W-E3-08.pdf, Height=1.35mm, Manufacturer_Part_Number=1N4148W-E3-08, Mouser2 Price/Stock=https://www.mouser.com/Search/Refine.aspx?Keyword=78-1N4148W-E3-08, Supplier 1=Digi-Key
D7: library part ZMM5232B, "Zener Diode 5.6V 0.5W", Manufacturer_Name=Rectron, Supplier Part Number 1=583-ZMM5232B, Datasheet Link=https://componentsearchengine.com/Datasheets/1/ZMM5232B.pdf, Height=1.5mm, Manufacturer_Part_Number=ZMM5232B, Supplier 1=Mouser
FL1: library part 744844221, "Common Mode Choke 220uH 12A", Manufacturer_Name="Wurth Elektronik", Height=33mm, Manufacturer_Part_Number=744844221
IC1 IC2: library part IRS2008SPBF, "Gate Drive IC", Manufacturer_Name=Infineon, Supplier Part Number 1=726-IRS2008SPBF, Height=1.75mm, Manufacturer_Part_Number=IRS2008SPBF, Supplier 1=Mouser
IC3: library part AD8215YRZ, "Integrated Circuit Amplifier", Manufacturer_Name="Analog Devices", Supplier Part Number 1=584-AD8215YRZ, Datasheet Link=http://www.analog.com/static/imported-files/data_sheets/AD8215.pdf, Height=1.75mm, Manufacturer_Part_Number=AD8215YRZ, Supplier 1=Mouser
IC4: library part AD8031ARTZ-REEL7, "Single Channel RRIO Operational Amplifier, 80 MHz BW, 35 V/us SR, Industrial, 5-pin SOT23 (RJ-5), Reel", Amplifiers Per Package=1, Generic Part Number=AD8031, Input Bias Current=450nA, Input Offset Voltage=1mV, Manufacturer="Analog Devices", Supplier Part Number 1=584-AD8031ARTZ-R7, Code_JEDEC=MO-178-AA, ComponentLink1Description="Manufacturer URL", ComponentLink1URL=http://www.analog.com/en/index.html, ComponentLink2Description=Datasheet, ComponentLink2URL=http://www.analog.com/static/imported-files/data_sheets/AD8031_8032.pdf, ComponentLink3Description="Package Specification", ComponentLink3URL=http://www.analog.com/static/imported-files/packages/PKG_PDF/SOT-23(RJ)/RJ_5.pdf, ComponentLink4Description="Reference Circuit", ComponentLink4URL=http://www.analog.com/en/all-operational-amplifiers-op-amps/operational-amplifiers-op-amps/ad8031/products/product.html#product-recommendations, DatasheetVersion="Rev. D", Iq/Amp=900uA, Mounting Technology="Surface Mount", PackageDescription="5-Pin Small Outline Transistor Package, Body 2.9 x 1.6 mm, Pitch 0.95 mm", PackageReference=RJ-5, PackageVersion=121608-A, Packing=Reel, PartNumber=AD8031ARTZ-REEL7, RevisionNote="Reference Circuit URL fixed", Slew Rate=35V/us, Small Signal Bandwidth=80MHz, Supplier 1=Mouser, V Span Max=12V, V Span Min=2.7V
IC5: "MagI³C-VDRM Variable Step Down Regulator Module WE-VDRM , Ui=6-42V", Manufacturer="Wuerth Elektronik", Supplier Part Number 1=710-171032401, ComponentLink1Description="Manufacturer URL", ComponentLink1URL=http://www.we-online.com, ComponentLink2Description=Datasheet, ComponentLink2URL=http://katalog-live.we-online.de/pm/datasheet/171032401.pdf, PackageReference="7 PIN PFM", PartNumber=171032401, Supplier 1=Mouser, Ui="6-42 V"
IC6: library part BD450M5FP-CE2, Manufacturer_Name="ROHM Semiconductor", Mouser2 Part Number=755-BD450M5FP-CE2, Datasheet Link=https://componentsearchengine.com//BD450M5FP-CE2.pdf, Manufacturer_Part_Number=BD450M5FP-CE2, Mouser2 Price/Stock=https://www.mouser.com/Search/Refine.aspx?Keyword=755-BD450M5FP-CE2
J1 J2: library part 929850-01-17-RA, "Connector 2.54mm", Manufacturer_Name=3M, Supplier Part Number 1=517-929850-01-17-RA, Datasheet Link=http://multimedia.3m.com/mws/media/22500O/3mtm-boardmount-skt-100-100x-100strt-sldr-tails-ts0815.pdf, Height=8.26mm, Manufacturer_Part_Number=929850-01-17-RA, Supplier 1=Mouser
L1: library part 74438336100, "Inductor", Manufacturer_Name="Wurth Elektronik", Supplier Part Number 1=710-74438336100, Datasheet Link=http://katalog.we-online.de/pbs/datasheet/74438336100.pdf, Manufacturer_Part_Number=74438336100, Supplier 1=Mouser
LED1: library part 150080GS75000, "SMD mono-color Chip LED, WL-SMCW, Green", Color=Green, Manufacturer="Wuerth Elektronik", Supplier Part Number 1=710-150080GS75000, ComponentLink1Description="Manufacturer URL", ComponentLink1URL=http://www.we-online.com, ComponentLink2Description=Datasheet, ComponentLink2URL=http://katalog.we-online.com/led/datasheet/150080GS75000.pdf, PackageReference=0805_A, PartNumber=150080GS75000, Supplier 1=Mouser
M1 M2 M3 M4: library part BSC040N10NS5ATMA1, "MOSFET N-CH 100V 100A 8TDSON / Mosfet Switcher", Continuous Drain Current=100A, Drain To Source Breakdown Voltage=100V, Drain To Source Resistance=3.4mΩ, Gate To Source Voltage=20V, Input Capacitace At Vds="4100pF @ 50V", Manufacturer=Infineon, Max Forward Diode Voltage=1.1V, Max Junction Temp=+150°C, Package=PG-TDSON-8, Power Dissipation=139W, Pulse Drain Current=400A, Supplier Part Number 1=726-BSC040N10NS5ATMA, Temperature="-55°C to +150°C", Temperature Range Low=-55°C, Typ Forward Diode Voltage=0.9V, Automotive=No, Category=Trans, ComponentLink2Description=Datasheet, ComponentLink2URL=https://www.infineon.com/dgdl/Infineon-BSC040N10NS5-DS-v02_02-EN.pdf?fileId=5546d4624a0bf290014a0fbcee2e6b38, Depletion Mode=False, Device Class L1="Discrete Semiconductors", Device Class L2=Transistors, Device Class L3=MOSFETs, Digikey Description="MOSFET N-CH 100V 100A 8TDSON", Drain To Source Voltage=100V, Footprint Url=https://www.infineon.com/dgdl/Infineon-PG-TDSON-8-7-FP-v01_00-EN.pdf?fileId=5546d46259d9a4bf015a1b6adadd1f0a, Gate Charge At Vgs="58nC @ 10V", Height=1.1mm, Lead Free=Yes, Manufacturer Part Number=BSC040N10NS5ATMA1, Mouser Description="MOSFET N-Ch 100V 100A TDSON-8", Number Of Channels=1, Number Of N Channels=1, Octopart=https://octopart.com/bsc040n10ns5atma1-infineon-52825711, Reverse Recovery Charge=90nC, Reverse Recovery Time=54ns, RoHS=TRUE, Rthja Max=50K/W, Supplier 1=Mouser, Temperature Range High=+150°C, Threshold Vgs Max=3.8V, Threshold Vgs Min=2.2V, Transconductance=120S, Turn Off Delay Time=32ns, Turn On Delay Time=13ns
M5 M6 M7 M8: library part M3_Mounting_hole
P1 P2: "Serie 313 - 5.08mm Close Horizontal PCB Header WR-TBL, 2 pin", Manufacturer="Wurth Elektronik", Operating Temperature=-40to105degC, Supplier Part Number 1=710-691313510002, Datasheet URL=http://katalog.we-online.de/em/datasheet/6913135100xx.pdf, Gender=Male, Manufacturer URL=http://www.we-online.de, Mounting Technology=THT, Package Reference=691313510002, Packaging=Box, Part Number=691313510002, Pin Number=2, Pitch=5.08mm, Publisher=WurthElektronik, Supplier 1=Mouser
R1: library part FC4L110R005FER, "Resistor 0R005 5W", Manufacturer_Name=Ohmite, Supplier Part Number 1=588-FC4L110R005FER, Height=0.7mm, Manufacturer_Part_Number=FC4L110R005FER, Supplier 1=Mouser
R2 R3 R10 R11: library part CRCW12064R70FKEA, "RES Thick Film, 4.7Ω, 1%, 0.25W, 100ppm/°C, 1206 / MOSFET Gate Fast-off Resistor 4.7Ohm", Case Code (Imperial)=1206, Case Code (Metric)=3216, Max Operating Temperature=155°C, Max Power Dissipation=250mW, Min Operating Temperature=-55°C, Package Quantity=10, Resistance=4.7R, Supplier Part Number 1=71-CRCW12064R70FKEA, Temperature Coefficient=100ppm/°C, Tolerance=1%, Voltage Rating=200V, Case/Package=1206, Composition="Thick Film", Contact Plating=Tin, Depth=1.6mm, Features="Automotive AEC-Q200", Height=0.024inch, Length=3.2mm, Military Standard=Not, Mount="Surface Mount", Number of Pins=2, Number of Terminations=2, Packaging="Tape and Reel", Power Rating=250mW, Radiation Hardening=No, Supplier 1=Mouser, Weight=0.000353oz, Width=0.063inch
R4 R5 R12 R13: library part CRCW120610R0FKEA, "RES Thick Film, 10Ω, 1%, 0.25W, 100ppm/°C, 1206 / MOSFET Gate Resistor 10Ohm", Case Code (Imperial)=1206, Case Code (Metric)=3216, Max Operating Temperature=155°C, Max Power Dissipation=250mW, Min Operating Temperature=-55°C, Package Quantity=10, Supplier Part Number 1=541-10.0FDKR-ND, Temperature Coefficient=100ppm/°C, Tolerance=1%, Voltage Rating=200V, Case/Package=1206, Composition="Thick Film", Contact Plating=Tin, Depth=1.6mm, Features="Automotive AEC-Q200", Height=0.55mm, Lead Free="Lead Free", Length=3.2mm, Military Standard=Not, Number of Pins=2, Number of Terminations=2, Packaging="Tape and Reel", Power Rating=250mW, Radiation Hardening=No, Resistance=10R, Supplier 1=Digi-Key, Termination=SMD/SMT, Voltage Rating (DC)=200V, Weight=0.000353oz, Width=0.063inch
R6 R7 R8 R9 R30: library part CRCW080510K0FKEB, "High Presicion 10K Ohm", Supplier Part Number 1=26R4046, Supplier 1=Newark
R14 R15: library part CRCW0805470RFKEB, "Resistor 470 Ohm", Supplier Part Number 1=71-CRCW0805470RFKEB, Number of Terminations=2, Supplier 1=Mouser
R16 R20: library part CRCW08051K00FKEA, "Resistor 1k Ohm", Supplier Part Number 1=71-CRCW0805-1.0K-E3, Number of Terminations=2, Supplier 1=Mouser
R17: library part CRCW08056K80FKEA, "Resistor 6.8K Ohm", Supplier Part Number 1=71-CRCW0805-6.8K-E3, Number of Terminations=2, Supplier 1=Mouser
R18: library part CRCW0805100RFKEB, "Resistor 100 Ohm", Supplier Part Number 1=71-CRCW0805100RFKEB, Number of Terminations=2, Supplier 1=Mouser
R19: library part CRCW080510K0FKEA, "Resistor 10K Ohm", Supplier Part Number 1=71-CRCW0805-10K-E3, Number of Terminations=2, Supplier 1=Mouser
R21: library part CRCW0805100KFKEB, "Resistor 100K Ohm", Supplier Part Number 1=71-CRCW0805100KFKEB, Number of Terminations=2, Supplier 1=Mouser
R22: library part CRCW080518K0FKEA, "Resistor 18K Ohm", Supplier Part Number 1=71-CRCW080518K0FKEA, Number of Terminations=2, Supplier 1=Mouser
R23: library part CR0805-FX-1603ELF, "Resistor 160K Ohm", Supplier Part Number 1=652-CR0805FX-1603ELF, Number of Terminations=2, Supplier 1=Mouser
R24: library part ERA-6ARW153V, "High Presicion 15K Ohm", Supplier Part Number 1=667-ERA-6ARW153V, Supplier 1=Mouser
R25: library part ERA-6ARB103V, "High Presition and High reliability 10K Ohm Resistor", Supplier Part Number 1=667-ERA-6ARB103V, Supplier 1=Mouser
R26: library part CRCW08052K00FKEB, "RES Thick Film, 2kΩ, 1%, 0.125W, 100ppm/°C, 0805", Case Code (Imperial)=0805, Case Code (Metric)=2012, Max Operating Temperature=155°C, Max Power Dissipation=125mW, Min Operating Temperature=-55°C, Package Quantity=10000, Resistance=2kR, Supplier Part Number 1=71-CRCW08052K00FKEB, Temperature Coefficient=100ppm/°C, Tolerance=1%, Voltage Rating=150V, Case/Package=0805, Composition="Thick Film", Contact Plating=Tin, Features="Automotive AEC-Q200", Height=0.02inch, Lead Free="Lead Free", Length=0.079inch, Number of Pins=2, Number of Terminations=2, Packaging="Tape and Reel", Power Rating=125mW, Radiation Hardening=No, Supplier 1=Mouser, Termination=SMD/SMT, Voltage Rating (DC)=150V, Weight=0.000194oz, Width=0.049inch
R27: library part CRCW08051K30FKEB, "Resistor 1K3 Ohm", Supplier Part Number 1=71-CRCW08051K30FKEB, Number of Terminations=2, Supplier 1=Mouser
R28: library part CRCW080510K0FKEAC, "Resistor 10K Ohm", Supplier Part Number 1=71-CRCW0805-10K-E3, Number of Terminations=2, Supplier 1=Mouser
R29: library part ERA-6AED153V, "15K Ohm Resistor", Supplier Part Number 1=667-ERA-6AED153V, Supplier 1=Mouser
R31: library part CRCW08051M00FKEA, "RES Thick Film, 1MΩ, 1%, 0.125W, 100ppm/°C, 0805 / 1M Ohm Resistor", Case Code (Imperial)=0805, Case Code (Metric)=2012, Max Operating Temperature=155°C, Min Operating Temperature=-55°C, Package Quantity=5000, Power Rating=125mW, Resistance=1MR, Supplier Part Number 1=71-CRCW08051M00FKEAH, Temperature Coefficient=100ppm/°C, Tolerance=1%, Voltage Rating=150V, Case/Package=0805, Composition="Thick Film", Contact Plating=Tin, Depth=1.25mm, Height=0.45mm, Lead Free="Lead Free", Length=2mm, Military Standard=Not, Mount="Surface Mount", Number of Pins=2, Packaging="Tape and Reel", Radiation Hardening=No, Supplier 1=Mouser, Termination=SMD/SMT, Voltage Rating (DC)=150V, Weight=0.000194oz, Width=1.25mm
R32: library part ERJ-6ENF5622V, "56K Ohm Resistor", Supplier Part Number 1=667-ERJ-6ENF5622V, Supplier 1=Mouser
RT1: library part NTCS0805E3103HMT, "Thermistor 10Kohm B Parameter: 3950k", Manufacturer_Name=Vishay, Supplier Part Number 1=594-NTCS0805E3103HMT, Datasheet Link=http://www.vishay.com/docs/29044/ntcs0805e3t.pdf, Height=0.95mm, Manufacturer_Part_Number=NTCS0805E3103HMT, Supplier 1=Mouser
TP1 TP2 TP3 TP4 TP5 TP6 TP7 TP8 TP9 TP10 TP11 TP12 TP13 TP14 TP15: library part "Test Point", "Test Point 1mm by 1mm"
U1: library part TS432AILT, "Shunt voltage reference, adjustable, 1.24 to 10V, 0.5% precision, 3-Pin SOT23-3L, Tape and Reel", Supplier Part Number 1=497-TS432AILTCT-ND, ComponentLink1Description="Manufacturer URL", ComponentLink1URL=http://www.st.com, ComponentLink2Description=Datasheet, ComponentLink2URL=http://www.st.com/internet/com/TECHNICAL_RESOURCES/TECHNICAL_LITERATURE/DATASHEET/CD00003202.pdf, DatasheetVersion=Apr-2008, PackageDescription="3-Pin SOT-23 Package 0.95 mm Pitch, 2.4 mm Lead Span", PackageReference=SOT23-3, PackageVersion=2011, Supplier 1=Digi-Key

## Via types
v1: diameter 0.6, hole 0.3, Top Layer to Bottom Layer, 199 vias
v2: diameter 0.6, hole 0.3, Top Layer to Bottom Layer, tented top, 28 vias
v3: diameter 0.6, hole 0.35, Top Layer to Bottom Layer, 7 vias
v4: diameter 1, hole 0.5, Top Layer to Bottom Layer, 4 vias

## Nets (pads, with @x,y where several pads share a name; then routed paths per layer and width w, separated by ;. In a path a pad name is that pad's centre, name@x,y a point inside that pad or via, vN(x,y) a via of type N, cw(c..) or ccw(c..) an arc to the next point about the centre after c; other vN are vias at no path point)
5V: C22.2 C23.2 C24.2 C40.1 IC3.6 IC4.5 IC6.2 J2.1 R20.2 TP14.1 | length 31.1
  Top Layer w0.254: v1(30.5,73.25) 30.594,73.25 30.889,72.954 R20.2 ; v1@37.25,33 37.3,32.95 C22.2 38.69,33.165 38.063,33.792 38.063,34.59 IC3.6 ; IC4.5 41.75,47.2 41.923,47.027 41.923,46.421 42.094,46.25 v1(42.5,46.25) ; C23.2 43.19,50.19 v1(43.75,50.75) ; C24.2 44.675,59.45 47.315,56.811 47.489,56.811 J2.1
  Bottom Layer w0.254: TP14.1 v1(30.5,73.25) ; v1(42.5,46.25) 42.5,46.75 43.75,48 v1(43.75,50.75)
  other v1: 37.275,32.975 30.5,70 30.5,71 30.5,72 30.5,74.37 30.5,75.75 26,76 27.75,76 29.25,76
12V: C15.2 C16.2 C34.2 C35.2 C36.2 C37.2 C38.2 C39.2 D1.2 D2.2 D7.1 IC1.1 IC2.1 IC5.7 LED1.2 R22.2 TP12.1 | length 90.9
  Top Layer w0.254: C16.2 50.167,61.333 v1(49.5,62) ; v1@50.25,36.72 50.25,37.5 D1.2 52.826,37.124 52.826,37.08 53.001,36.905 IC1.1 ; v1(50.251,36.72) 50.251,36.259 C15.2 ; D2.2 50.267,63.668 49.25,62.651 49.25,62.25 v1(49.5,62) ; IC2.1 51.95,62.377 49.949,62.377 49.572,62 v1(49.5,62)
  Top Layer w1: C34.2@15.282,45.51 7.74,45.51 2.5,50.75 2.5,57.75 4,59.25 v4(16.75,59.25) ; LED1.2@29.082,47.25 29.132,47.25 31.632,49.75 33,49.75 v4(33.46,50.21) ; v4(30.5,59.5) 30.677,59.677 D7.1
  Bottom Layer w1: v4(16.75,59.25) 30.25,59.25 v4(30.5,59.5) ; TP12.1 34.54,50.21 v4(33.46,50.21) 36.25,53 49,53 v4(50,52)
Amp_out: IC3.5 R16.2 | length 8.5
  Top Layer w0.254: IC3.5 36.595,37.925 35.889,38.631 35.889,41.132 36.284,41.527 37.052,41.527 R16.2
"Current ADC Output": C26.2 C46.2 J1.16 R18.1 | length 47.2
  Top Layer w0.254: J1.16 11.432,77.568 11.432,76.663 C46.2@11.785,76.31 ; C46.2 C46.2@11.785,76.31 ; C26.2 38.575,50.95 R18.1 38.25,51.025 34.775,54.5 27.692,54.5 26.705,55.487 26.705,56.524 22.386,60.842 20.996,60.842 10.978,70.86 10.978,75.503 C46.2@11.785,76.31
"DCDC Input Filtered": C30.2 C31.2 IC5.1 L1.1 R21.2 R23.2
"DCDC Input Unfiltered": C8.1 C11.2 C32.2 C33.2 FL1.9 L1.2 R1.1
Feedback: C39.1 IC5.6 R22.1 R27.2 | length 7.8
  Top Layer w0.254: IC5.6 28.459,41.84 28.807,42.188 R27.2 28.807,42.45 29.305,42.948 29.447,42.948 29.901,43.402 30.409,43.402 30.757,43.75 R22.1 30.592,44.165 C39.1@30.592,45.6
GND: C3.2 C4.2 C5.2 C6.2 C7.2 C8.2 C9.1 C10.1 C11.1 C15.1 C16.1 C20.1 C21.1 C22.1 C23.1 C24.1 C25.1 C26.1 C28.2 C29.2 C30.1 C31.1 C32.1 C33.1 C34.1 C35.1 C36.1 C37.1 C38.1 C40.2 C42.1 C43.1 C44.1 C45.1 C46.1 C47.1 FL1.7 IC1.4 IC2.4 IC3.2 IC4.2 IC5.4 IC5.8 IC6.3 J1.1 M3.1 M3.2 M3.3 M4.1 M4.2 M4.3 R6.1 R7.1 R8.1 R9.1 R19.2 R26.2 R27.1 R28.1 R30.1 R32.1 RT1.2 U1.3 | length 94.7
  Top Layer w0.254: C47.1 9.493,72.257 v1(9.5,72.25) ; C46.1 12.215,74.69 12.568,74.337 12.568,74.318 13.348,73.538 C44.1 ; 22.75,39.25 22.8,39.3 IC5.4 29.607,39.3 C43.1@30.592,40.285 ; v1(23.25,71.75) 24.075,72.575 C40.2 ; R28.1 30.757,40.12 C43.1@30.592,40.285 ; R27.1 30.592,42.035 C43.1 C43.1@30.592,40.285 ; C28.2 32.951,66.799 v1(33,66.75) ; v1(37.75,70) U1.3 ; v1(39,38.5) 39.135,38.635 IC3.2 39.135,41.875 C25.1 40.935,41.94 R19.2 41.348,41.527 v1(42.723,41.527) 43.273,40.977 43.273,40.287 C20.1 ; IC4.2 40,46.25 v1(40.25,46.5) ; C22.1 40.31,33.165 40.663,33.518 42.493,33.518 ; C26.1 41.81,51.165 42.163,51.518 42.378,51.518 42.61,51.75 44.25,51.75 44.457,51.543 44.457,49.603 C23.1 ; C24.1 42.325,61.841 44.404,63.921 R30.1 ; v1(42.5,33) 42.493,33.007 42.493,33.518 ; C21.1 43.51,34.535 42.493,33.518 ; v1(47,54) 47.5,54.5 51.559,54.5 R9.1 R7.1 51.692,58.065 51.89,58.263 50.977,58.263 50.382,58.858 C16.1 47.858,58.858 v1(47.75,58.75) ; C42.1 47.462,66.538 v1(47.5,66.5) ; C15.1 50.285,34.39 49.543,33.648 49.262,33.648 48.873,33.26 48.873,32.127 v1(49.5,31.5) 50.179,31.5 ; R8.1 R6.1 50.179,31.5 ; IC1.4 51.774,33.095 50.179,31.5 ; v1(54.5,69.75) 54.85,69.4 C45.1 56.968,69.4 57.405,68.963 57.405,68.659 57.841,68.222 65.152,68.222 65.4,67.974 RT1.2 ; v1(54.5,71.5) 56.014,71.5 R32.1 ; C9.1 76.5,31.95 v1(76.5,30.25)
  Top Layer w0.5: C10.1 v1(72.5,77)
  other v1: 25,27.75 26.5,27.75 28,27.75 29.5,27.75 30.75,27.75 30.75,29.5 30.75,31 81,35.75 63,42.75 64,42.75 14.5,50.5 16,50.5 17.75,50.5 19.5,50.5 21.25,50.5 23,50.5 24.5,50.5 43,51.75 33.75,60.25 43,62.5 33.75,63.25 21.5,64 22.75,64 1.75,65.75 19,66.75 21,66.75 23.25,66.75 20,67.75 22.25,67.75 19,69 21,69 23.25,69 33.75,70 20,70.5 22.25,70.5 19,71.75 21,71.75 81.25,73.25 12.958,73.928
  other v2: 14.877,37.5 16.077,37.5 17.277,37.5 18.477,37.5 19.677,37.5 20.877,37.5 22.077,37.5 14.877,38.7 16.077,38.7 17.277,38.7 18.477,38.7 19.677,38.7 20.877,38.7 22.077,38.7 14.877,39.9 16.077,39.9 17.277,39.9 18.477,39.9 19.677,39.9 20.877,39.9 22.077,39.9 14.877,41.1 16.077,41.1 17.277,41.1 18.477,41.1 19.677,41.1 20.877,41.1 22.077,41.1
  other v3: 62.75,37.25 63,41.25 64,41.25 62.25,63.75 62.25,65.25 64,66.943 62.75,67.5
"In +": R1.4 R14.2 TP9.1 | length 12.6
  Top Layer w0.254: R14.2 45.475,36.476 45.823,36.128 46.223,36.128 v1@46.551,35.801 ; v1(46.601,35.75) 46.964,35.387 46.964,26.161 47.8,25.325 R1.4
"In -": R1.3 R15.2 TP10.1 | length 19.1
  Top Layer w0.254: R15.2 45.625,38.5 v1(48,38.5) ; v1@48.101,38.35 48.25,38.201 48.25,29.275 52.2,25.325 R1.3
  Bottom Layer w0.254: TP10.1 47.482,38.518 47.982,38.518 v1(48,38.5)
NetC2_1: C2.1 IC1.6 M2.1 M2.2 M2.3 M4.5-6-7-8 P2.1 TP5.1 | length 7.5
  Top Layer w0.254: IC1.6 59.76,34.365 60.7,33.425 C2.1 ; v1(62.25,34.75) 62.25,34.675 C2.1 ; M2.1 63.373,32.905 63.25,33.028 63.25,33.25 63.075,33.425 C2.1
  other v1: 65.5,36.2 66.4,36.2 67.3,36.2 68.2,36.2 65.5,37.1 66.4,37.1 67.3,37.1 68.2,37.1 65.5,38 66.4,38 67.3,38 68.2,38 65.5,38.9 66.4,38.9 67.3,38.9 68.2,38.9 65.5,39.8 66.4,39.8 67.3,39.8 68.2,39.8
NetC2_2: C2.2 D1.1 IC1.8 | length 9.5
  Top Layer w0.254: D1.1 55.649,38.6 55.798,38.749 55.798,39.21 55.99,39.402 57.01,39.402 57.443,38.969 57.443,37.307 57.647,37.103 58.314,37.103 IC1.8 59.656,36.905 60.349,36.212 60.349,36.126 60.7,35.775 C2.2
NetC12_1: C12.1 C13.2 C14.2 C17.2 C18.2 IC2.6 M1.1 M1.2 M1.3 M3.5-6-7-8 TP6.1 | length 8.2
  Top Layer w0.254: IC2.6 58.827,59.533 59.867,58.493 C12.1 C12.1@60.467,58.493 ; v1(61.5,59.5) 61.474,59.5 C12.1@60.467,58.493 ; M1.1 63.225,58.905 63.102,58.782 63.102,58.602 62.993,58.493 C12.1@60.467,58.493
  Bottom Layer w0.254: TP6.1@61.276,59.276 v1(61.5,59.5)
  other v1: 65.5,62.2 66.4,62.2 67.3,62.2 68.2,62.2 65.5,63.1 66.4,63.1 67.3,63.1 68.2,63.1 65.5,64 66.4,64 67.3,64 68.2,64 65.5,64.9 66.4,64.9 67.3,64.9 68.2,64.9 65.5,65.8 66.4,65.8 67.3,65.8 68.2,65.8
NetC12_2: C12.2 D2.1 IC2.8 | length 7.9
  Top Layer w0.254: D2.1 54.067,63.668 54.315,63.42 54.315,63.17 55.412,62.073 IC2.8 58.116,62.073 58.768,61.421 58.768,61.082 59.008,60.843 C12.2
NetC13_1: C13.1 C14.1 C17.1 C18.1 P2.2
NetC19_1: C19.1 C20.2 IC3.1 R15.1 | length 4.9
  Top Layer w0.254: IC3.1 40.567,40.05 C20.2 42,39.94 C19.1 42.09,38.35 R15.1
NetC19_2: C19.2 C21.2 IC3.8 R14.1 | length 5
  Top Layer w0.254: IC3.8 40.443,34.75 C21.2 42,34.86 C19.2 42.09,36.55 R14.1
NetC25_2: C25.2 R16.1 R17.2 | length 3.6
  Top Layer w0.254: R17.2 37,44.173 37.348,43.825 R16.1 37.665,43.56 C25.2
NetC27_1: C27.1 IC4.4 R19.1 R29.1 | length 12
  Top Layer w0.254: R19.1 41.152,43.825 41.5,44.173 IC4.4 43.715,45.3 43.88,45.135 44.309,45.135 45.5,46.326 45.5,47.377 44.877,48 42.803,48 42.383,48.42 42.383,48.462 41.81,49.035 C27.1
NetC28_1: C28.1 C29.1 D7.2 IC6.1 TP11.1 | length 2.3
  Bottom Layer w0.254: TP11.1 25.25,64 v1(26,64.75)
NetC41_1: C41.1 R24.1 R30.2 TP15.1 U1.1 | length 13.3
  Top Layer w0.254: v1(39.5,66.75) 39.571,66.821 C41.1 ; U1.1 41.25,69.05 40.65,68.45 C41.1 ; R24.1@43.979,69.05 R24.1 R30.2 43.034,65.871 42.908,65.745 41.511,65.745 40.65,66.606 C41.1
  Bottom Layer w0.254: TP15.1 39.25,67.094 39.5,66.844 v1(39.5,66.75)
NetC43_2: C43.2 IC5.5 | length 3.2
  Top Layer w0.254: IC5.5 28.902,40.57 C43.2
NetD3_1: D3.1 IC1.7 R4.2 TP2.1 | length 13.8
  Top Layer w0.254: v1(55.5,33.75) 55.5,32.9 56.5,31.9 D3.1 58.074,31.65 R4.2 58.474,31.501 56.25,33.725 56.25,35.486 56.399,35.635 IC1.7
  Bottom Layer w0.254: TP2.1@55.5,33.344 55.721,33.123 55.873,33.123 55.873,33.377 v1(55.5,33.75) TP2.1@55.5,33.344
NetD3_2: D3.2 R2.2 | length 3.8
  Top Layer w0.254: D3.2 56.669,28.519 57.923,28.519 R2.2@58.474,29.07 ; R2.2 R2.2@58.474,29.07 ; R2.2@58.474,29.07 58.474,29.251 58.858,29.635 58.858,29.454 R2.2@58.474,29.07
NetD4_1: D4.1 IC2.7 R5.2 TP1.1 | length 9
  Top Layer w0.254: R5.2 57.191,56.818 D4.1 55.667,57.068 55.419,57.316 55.169,57.316 54.5,57.984 v1(54.5,59.25) 54.75,59.25 56.303,60.803 IC2.7
NetD4_2: D4.2 R3.2 | length 2.4
  Top Layer w0.254: D4.2 55.667,53.768 56.067,54.168 R3.2
NetD5_1: D5.1 IC1.5 R12.2 TP7.1 | length 20.3
  Top Layer w0.254: v1(56.25,37) 56.316,37.066 56.316,38.266 D5.1 ; v1(57,34.25) 57,34.17 58.075,33.095 IC1.5 ; v1(60.25,42.75) 61,42.75 61.389,42.361 61.389,41.337 R12.2
  Bottom Layer w0.254: TP7.1 59,34.25 v1(57,34.25) 57,36.25 v1(56.25,37) 56.25,38.75 v1(60.25,42.75)
NetD5_2: D5.2 R10.2 | length 8.1
  Top Layer w0.254: D5.2 57.256,41.75 57.458,41.952 57.458,42.254 57.66,42.456 59.287,42.456 60.131,41.612 60.131,40.146 61.526,38.751 R10.2
NetD6_1: D6.1 IC2.5 R13.2 TP8.1 | length 13.1
  Top Layer w0.254: v1(54.5,65) 55.364,65 55.708,64.656 55.708,63.559 D6.1 57.491,63.518 R13.2 ; v1(56.25,58.75) 56.539,58.461 57.481,58.461 IC2.5
  Bottom Layer w0.254: TP8.1@54.688,65 55.25,64.437 55.25,62.75 56.25,61.75 v1(56.25,58.75)
NetD6_2: D6.2 R11.2 | length 2.5
  Top Layer w0.254: D6.2 55.667,66.568 56.367,65.868 R11.2
NetIC4_3: IC4.3 R17.1 | length 3.2
  Top Layer w0.254: R17.1 37.25,47.225 38.106,46.369 38.106,45.855 38.488,45.473 38.927,45.473 IC4.3
NetLED1_1: LED1.1 R26.1 | length 2
  Top Layer w0.254: R26.1 27.457,49.75 27.857,49.35 LED1.1@29.082,49.35
NetM1_4: M1.4 R3.1 R5.1 | length 5.3
  Top Layer w0.254: R5.1 R3.1 62.298,54.168 63.225,55.095 M1.4
NetM2_4: M2.4 R2.1 R4.1 | length 4.2
  Top Layer w0.254: R4.1 R2.1 61.621,29.095 M2.4
NetM3_4: M3.4 R11.1 R13.1 | length 5.7
  Top Layer w0.254: R11.1 R13.1 60.693,63.417 61.244,62.866 61.495,62.866 62.265,62.095 M3.4
NetM4_4: M4.4 R10.1 R12.1 | length 8.8
  Top Layer w0.254: R12.1 R10.1 58.474,38.249 59.025,37.698 60.259,37.698 60.713,37.244 61.25,37.244 62.399,36.095 M4.4
"Op-Amp Out": C27.2 IC4.1 R18.2 R29.2 | length 8.9
  Top Layer w0.254: R18.2 R18.2@38.75,49.075 ; IC4.1 39.1,48.725 R18.2@38.75,49.075 ; R29.2 42.888,46.921 42.548,47.261 42.548,47.541 41.977,48.111 41.114,48.111 40.19,49.035 C27.2 40.015,49.075 R18.2@38.75,49.075
P+: C1.2 FL1.2 P1.2
P-: C1.1 FL1.4 P1.1
PWM_A: IC1.2 J1.6 R6.2 TP3.1 | length 66.6
  Top Layer w0.254: v1(51.75,36.75) 51.816,36.684 51.816,36.469 52.65,35.635 IC1.2 53.525,35.635 54.475,34.685 R6.2
  Bottom Layer w0.254: J1.6 35.6,57.788 34.325,56.513 34.325,55.476 32.173,53.325 32.173,49.407 43.83,37.75 49.816,37.75 50.066,38 50.5,38 v1(51.75,36.75) 52.75,35.75 TP3.1
PWM_B: IC2.2 J1.5 R7.2 TP4.1 | length 33.2
  Top Layer w0.254: v1(50.75,61.75) 50.87,61.75 51.817,60.803 IC2.2 52.692,60.803 53.642,59.853 R7.2
  Bottom Layer w0.254: J1.5 50.75,66.19 v1(50.75,61.75) 51.5,61 TP4.1
PWM_EN: IC1.3 IC2.3 J1.4 R8.2 R9.2 | length 109
  Top Layer w0.254: v1(34.75,75.75) v1(39.5,75.75) ; v1(48,60) 48.329,59.671 50.991,59.671 51.129,59.533 IC2.3 ; v1(49.5,33) 50.747,33 51.637,33.89 51.637,34.058 51.944,34.365 IC1.3 ; v1@50.25,30.25 v1(50.25,30.106) 50.25,29.963 51.715,28.498 53.473,28.498 54.475,29.5 R8.2 ; v1(50.25,53.75) 50.734,53.266 52.64,53.266 53.642,54.268 R9.2
  Top Layer w0.3: v1(39.5,75.75) 39.5,77.62 J1.4
  Bottom Layer w0.254: v1(34.75,75.75) 33.708,74.708 31.785,72.785 31.785,55.476 31.75,55.442 31.75,55.25 31.719,55.219 31.719,48.781 45.577,34.923 47.577,34.923 v1(49.5,33) 50.25,32.25 v1(50.25,30.106) ; v1(39.5,75.75) 39.5,75.387 48.127,66.76 48.127,63.49 48,63.363 v1(48,60) 50.25,57.75 v1(50.25,53.75)
Ron: IC5.2 R21.1 | length 3.3
  Top Layer w0.254: IC5.2 28.697,36.76 R21.1
"Temp ADC": C44.2 J1.15 R25.1 RT1.1 | length 70
  Top Layer w0.254: J1.15 12.74,77.355 14.207,75.888 C44.2 ; v1(32.25,74.997) 32.311,74.997 32.762,74.546 50.454,74.546 52.75,72.25 v1(52.75,69) 52.275,68.525 R25.1 ; v1(59.5,71.5) 61.945,71.5 64.769,68.676 66.548,68.676 67.035,68.19 67.352,68.19 67.6,67.942 RT1.1
  Bottom Layer w0.254: J1.15 15.04,76.5 17.5,76.5 19.003,74.997 v1(32.25,74.997) ; v1(52.75,69) 57,69 v1(59.5,71.5)
UVLO: IC5.3 R23.1 R28.2 | length 5.9
  Top Layer w0.254: IC5.3 25.852,38.1 R28.2 28.807,37.85 29.155,37.502 29.617,37.502 30.034,37.085 30.034,36.973 30.532,36.475 R23.1
"Vin -": C3.1 C4.1 C5.1 C6.1 C7.1 C9.2 C10.2 M1.5-6-7-8 M2.5-6-7-8 R1.2 R31.2 | length 13.5
  Top Layer w0.3: R31.2 65.25,73 v1(66,72.25)
  Top Layer w1.5: C3.1 69.345,72.8 C10.2
  other v1: 67.25,22.25 67.25,23.5 67.25,24.75 71,28.25 72,28.25 73.25,28.25 74.25,28.25 65.5,29.2 66.4,29.2 67.3,29.2 68.2,29.2 65.5,30.1 66.4,30.1 67.3,30.1 68.2,30.1 65.5,31 66.4,31 67.3,31 68.2,31 65.5,31.9 66.4,31.9 67.3,31.9 68.2,31.9 65.5,32.8 66.4,32.8 67.3,32.8 68.2,32.8 70.75,33.25 72,33.25 73.25,33.25 74.25,33.25 65.5,53.75 67,53.75 68.5,53.75 70,54 65.5,55.2 66.4,55.2 67.3,55.2 68.2,55.2 70.25,55.5 65.5,56.1 66.4,56.1 67.3,56.1 68.2,56.1 65.5,57 66.4,57 67.3,57 68.2,57 70.25,57 65.5,57.9 66.4,57.9 67.3,57.9 68.2,57.9 70.25,58.5 65.5,58.8 66.4,58.8 67.3,58.8 68.2,58.8 69.75,60 67.5,72.25 69.25,72.25 66,75.5 69.25,75.5
"Vin ADC": C45.2 C47.2 J1.17 R31.1 R32.2 | length 61.5
  Top Layer w0.254: J1.17 7.66,77.42 9.193,75.888 C47.2 ; v1(17.25,75.25) 18,75.25 20,77.25 32.25,77.25 34.5,75 54.275,75 55.677,73.598 55.927,73.598 56.275,73.25 R31.1 56.275,72.75 56.623,72.402 57.101,72.402 57.35,72.153 57.35,72.136 57.599,71.887 57.677,71.887 58.225,71.339 R32.2 58.225,69.634 C45.2
  Bottom Layer w0.254: J1.17 11.21,75.25 v1(17.25,75.25)
"Vref 3.1V": C41.2 C42.2 R20.1 R24.2 R25.2 TP13.1 U1.2 | length 19.5
  Top Layer w0.254: U1.2 R24.2@44.029,70.95 ; C41.2 42.27,68.031 43.063,68.824 43.063,69.134 44.029,70.1 R24.2@44.029,70.95 ; R20.1 R24.2@44.475,70.504 ; v1(50.5,72.25) 50.419,72.169 R25.2 50.197,70.697 C42.2 44.726,70.697 R24.2 R24.2@44.475,70.504 ; R24.2@44.029,70.95 R24.2@44.475,70.504
  Bottom Layer w0.254: TP13.1 v1(50.5,72.25)
pads on no net: IC3.3 IC3.4 IC3.7 J1.2 J1.3 J1.7 J1.8 J1.9 J1.10 J1.11 J1.12 J1.13 J1.14 J2.2 J2.3 J2.4 J2.5 J2.6 J2.7 J2.8 J2.9 J2.10 J2.11 J2.12 J2.13 J2.14 J2.15 J2.16 J2.17 M5.1 M6.1 M7.1 M8.1

## Polygon pours and split planes (outlines as drawn)
GND on Top Layer "GND_L01_P014" (solid, remove dead copper, pour order 14): 64.5,36.75 64.5,43.5 62,43.5 62,36.75
NetC12_1 on Top Layer "NETC12_1_L01_P011" (solid, remove dead copper, pour order 11): 62.5,55.75 64.75,55.75 64.75,59.75 67.25,59.75 69.25,61.75 69.25,64.5 65.25,64.5 64,63.25 64,61.5 62.5,61.5
GND on Top Layer "GND_L01_P023" (solid, remove dead copper, pour order 23): 21,61.25 21,64.5 23,64.5 23,62.25
GND on Top Layer "GND_L01_P022" (solid, remove dead copper, pour order 22): 24,31.5 31.25,31.5 31.25,27.25 24,27.25
5V on Top Layer "5V_L01_P021" (solid, remove dead copper, pour order 21): 25.5,76.75 31.25,76.75 31.25,69.25 25.5,69.25
NetC28_1 on Top Layer "NETC28_1_L01_P020" (solid, remove dead copper, pour order 20): 30.75,67.75 30.75,65.5 31.75,65.5 31.75,64 29,64 29,60.75 25.25,60.75 25.25,67.75
GND on Top Layer "GND_L01_P019" (solid, remove dead copper, pour order 19): 13.25,51.25 24.5,51.25 26.5,51.25 26.5,48.75 28.25,48.75 28.25,48 27.25,47 13.25,47
GND on Top Layer "GND_L01_P018" (solid, remove dead copper, pour order 18): 13.25,31.75 19.5,31.75 19.5,35.75 19.75,36 23.25,36 23.25,44 13.25,44
12V on Top Layer "12V_L01_P017" (solid, remove dead copper, pour order 17): 13.25,46.5 28.25,46.5 28.25,47.5 28.5,47.75 29.75,47.75 29.75,43.75 29,43 27.75,43 27.75,42.5 23.75,42.5 23.75,44.5 13.25,44.5
"DCDC Input Filtered" on Top Layer "DCDC_INPUT_FILTERED_L01_P016" (solid, remove dead copper, pour order 16): 22,33.75 23.75,33.75 23.75,36 27.75,36 27.75,35 32,35 32,32.25 31.75,32 23.75,32 23.75,29 22,29
"DCDC Input Unfiltered" on Top Layer "DCDC_INPUT_UNFILTERED_L01_P015" (solid, remove dead copper, pour order 15): 18,23.5 18,27.5 13,27.5 12.75,27.75 12.75,31.25 19.75,31.25 19.75,33.75 21.5,33.75 21.5,28.5 24,28.5 24,23.5
GND on Top Layer "GND_L01_P013" (solid, remove dead copper, pour order 13): 62,63.25 62.389,62.861 64,62.861 64,63.75 64.5,64.25 64.5,68 62,68
NetC2_1 on Top Layer "NETC2_1_L01_P010" (solid, remove dead copper, pour order 10): 62.75,29.75 64.75,29.75 64.75,33.5 66.75,33.5 69,35.75 68.5,36.25 64,36.25 64,35.25 62.75,34
NetC12_1 on Top Layer "NETC12_1_L01_P009" (solid, remove dead copper, pour order 9): 65,66.5 70.5,66.5 70.5,69.25 72.5,71.25 74.75,71.25 74.75,53.75 71.75,53.75 71.5,54 71.5,60.25 70.5,61.25 65,61.25
"Vin -" on Top Layer "VIN_-_L01_P008" (solid, remove dead copper, pour order 8): 65,76.25 70.5,76.25 70.5,70.25 65,70.25
"Vin -" on Top Layer "VIN_-_L01_P007" (solid, remove dead copper, pour order 7): 65,60.25 70.5,60.25 70.5,53.25 65,53.25